# Allegro board Tiny210SDK-1310-PCB.brd
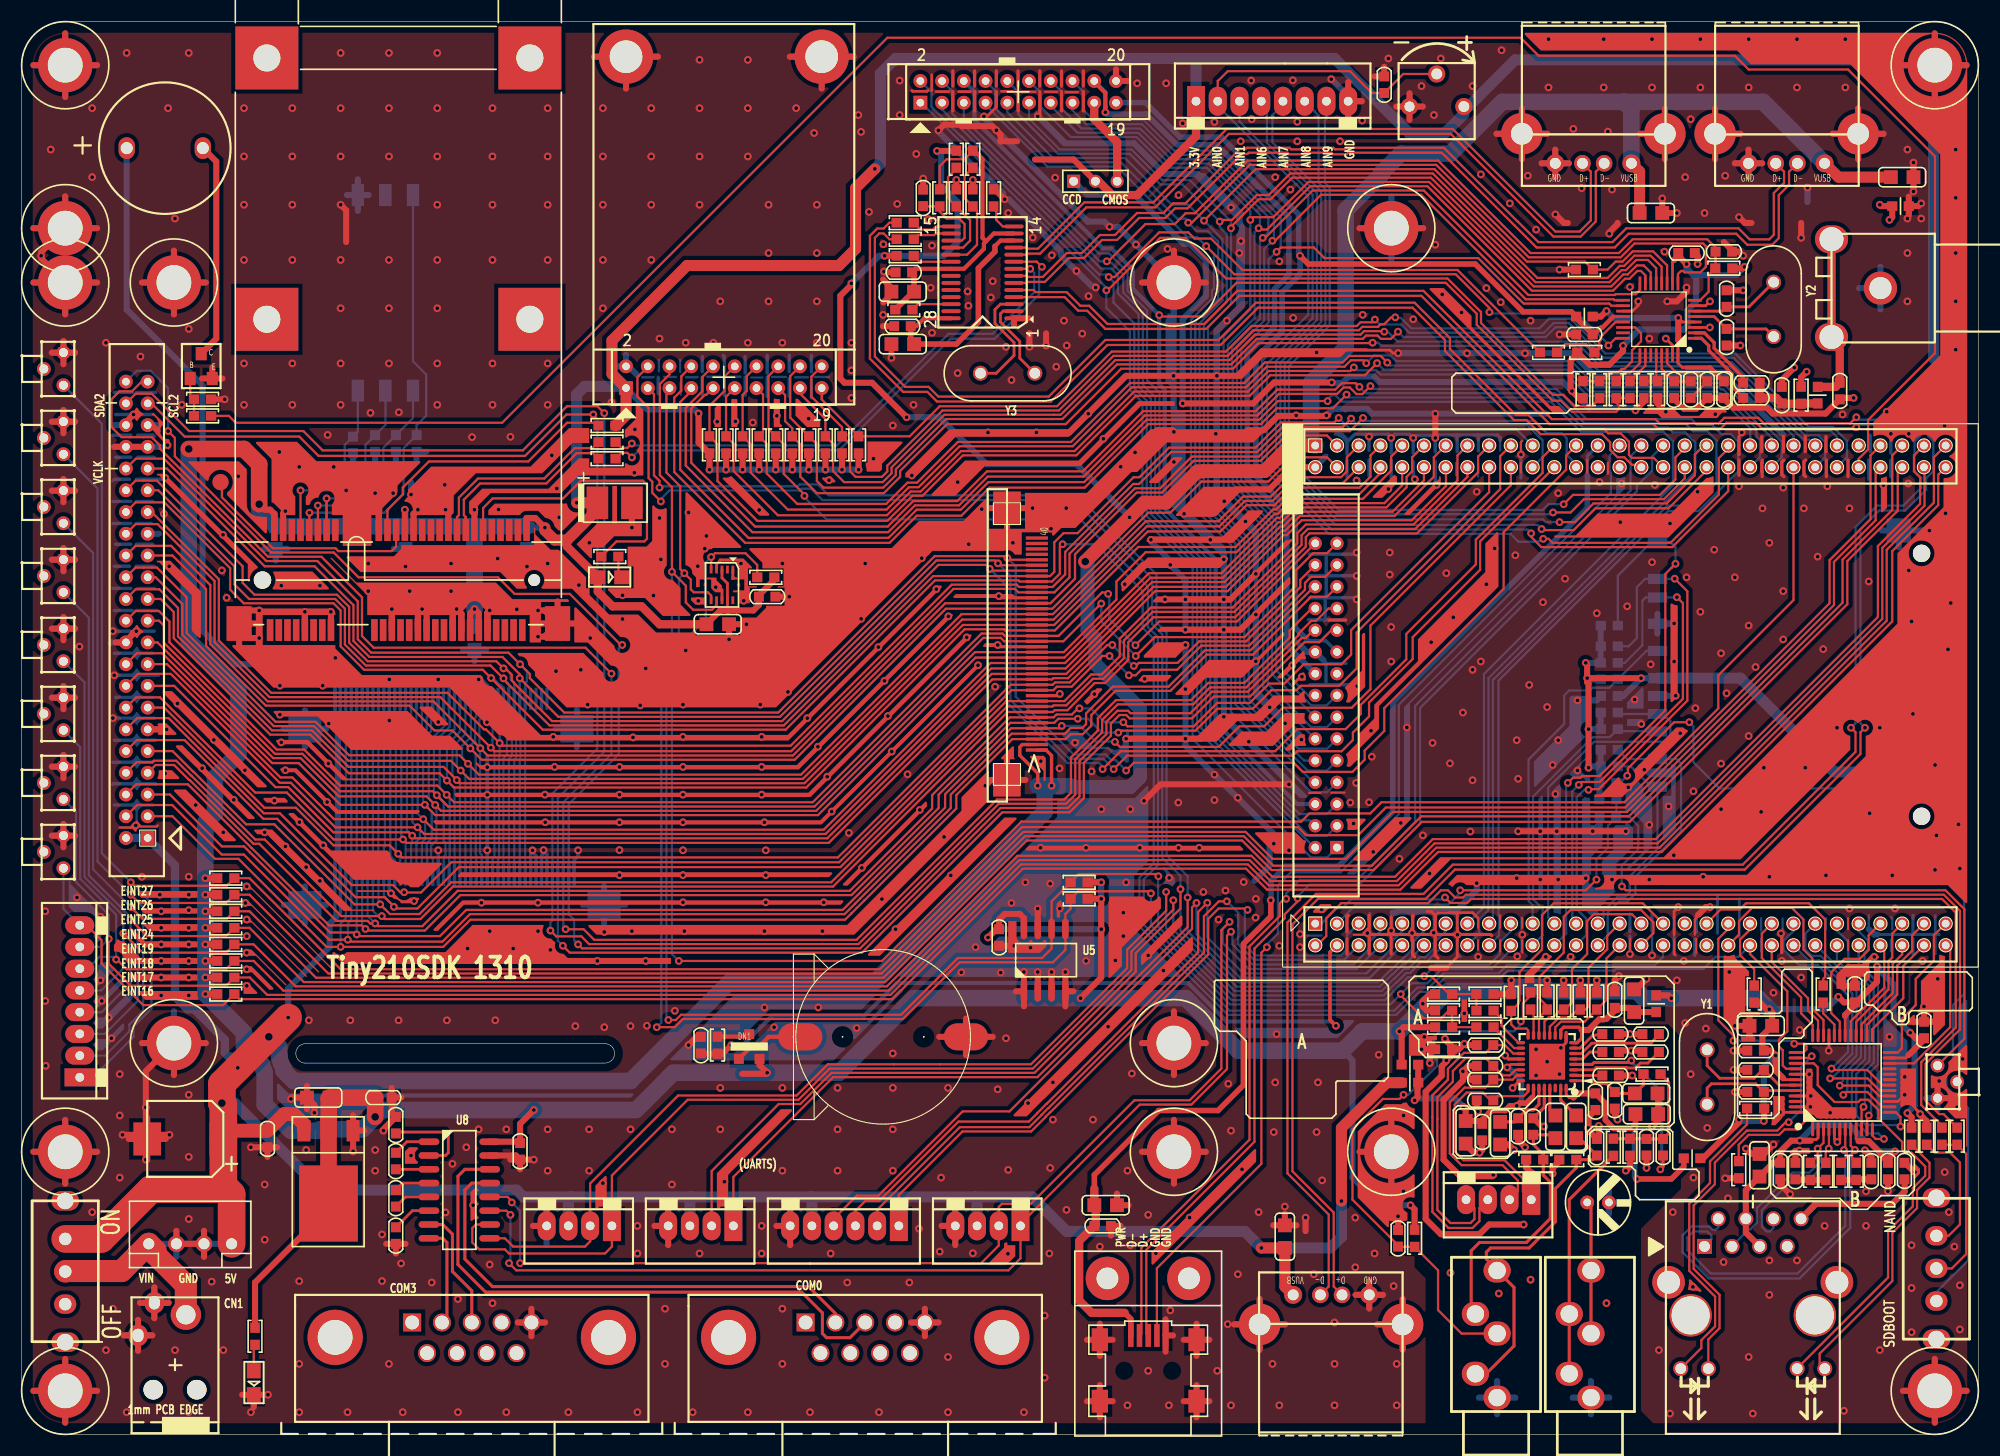
[diagram p0: board, top side]
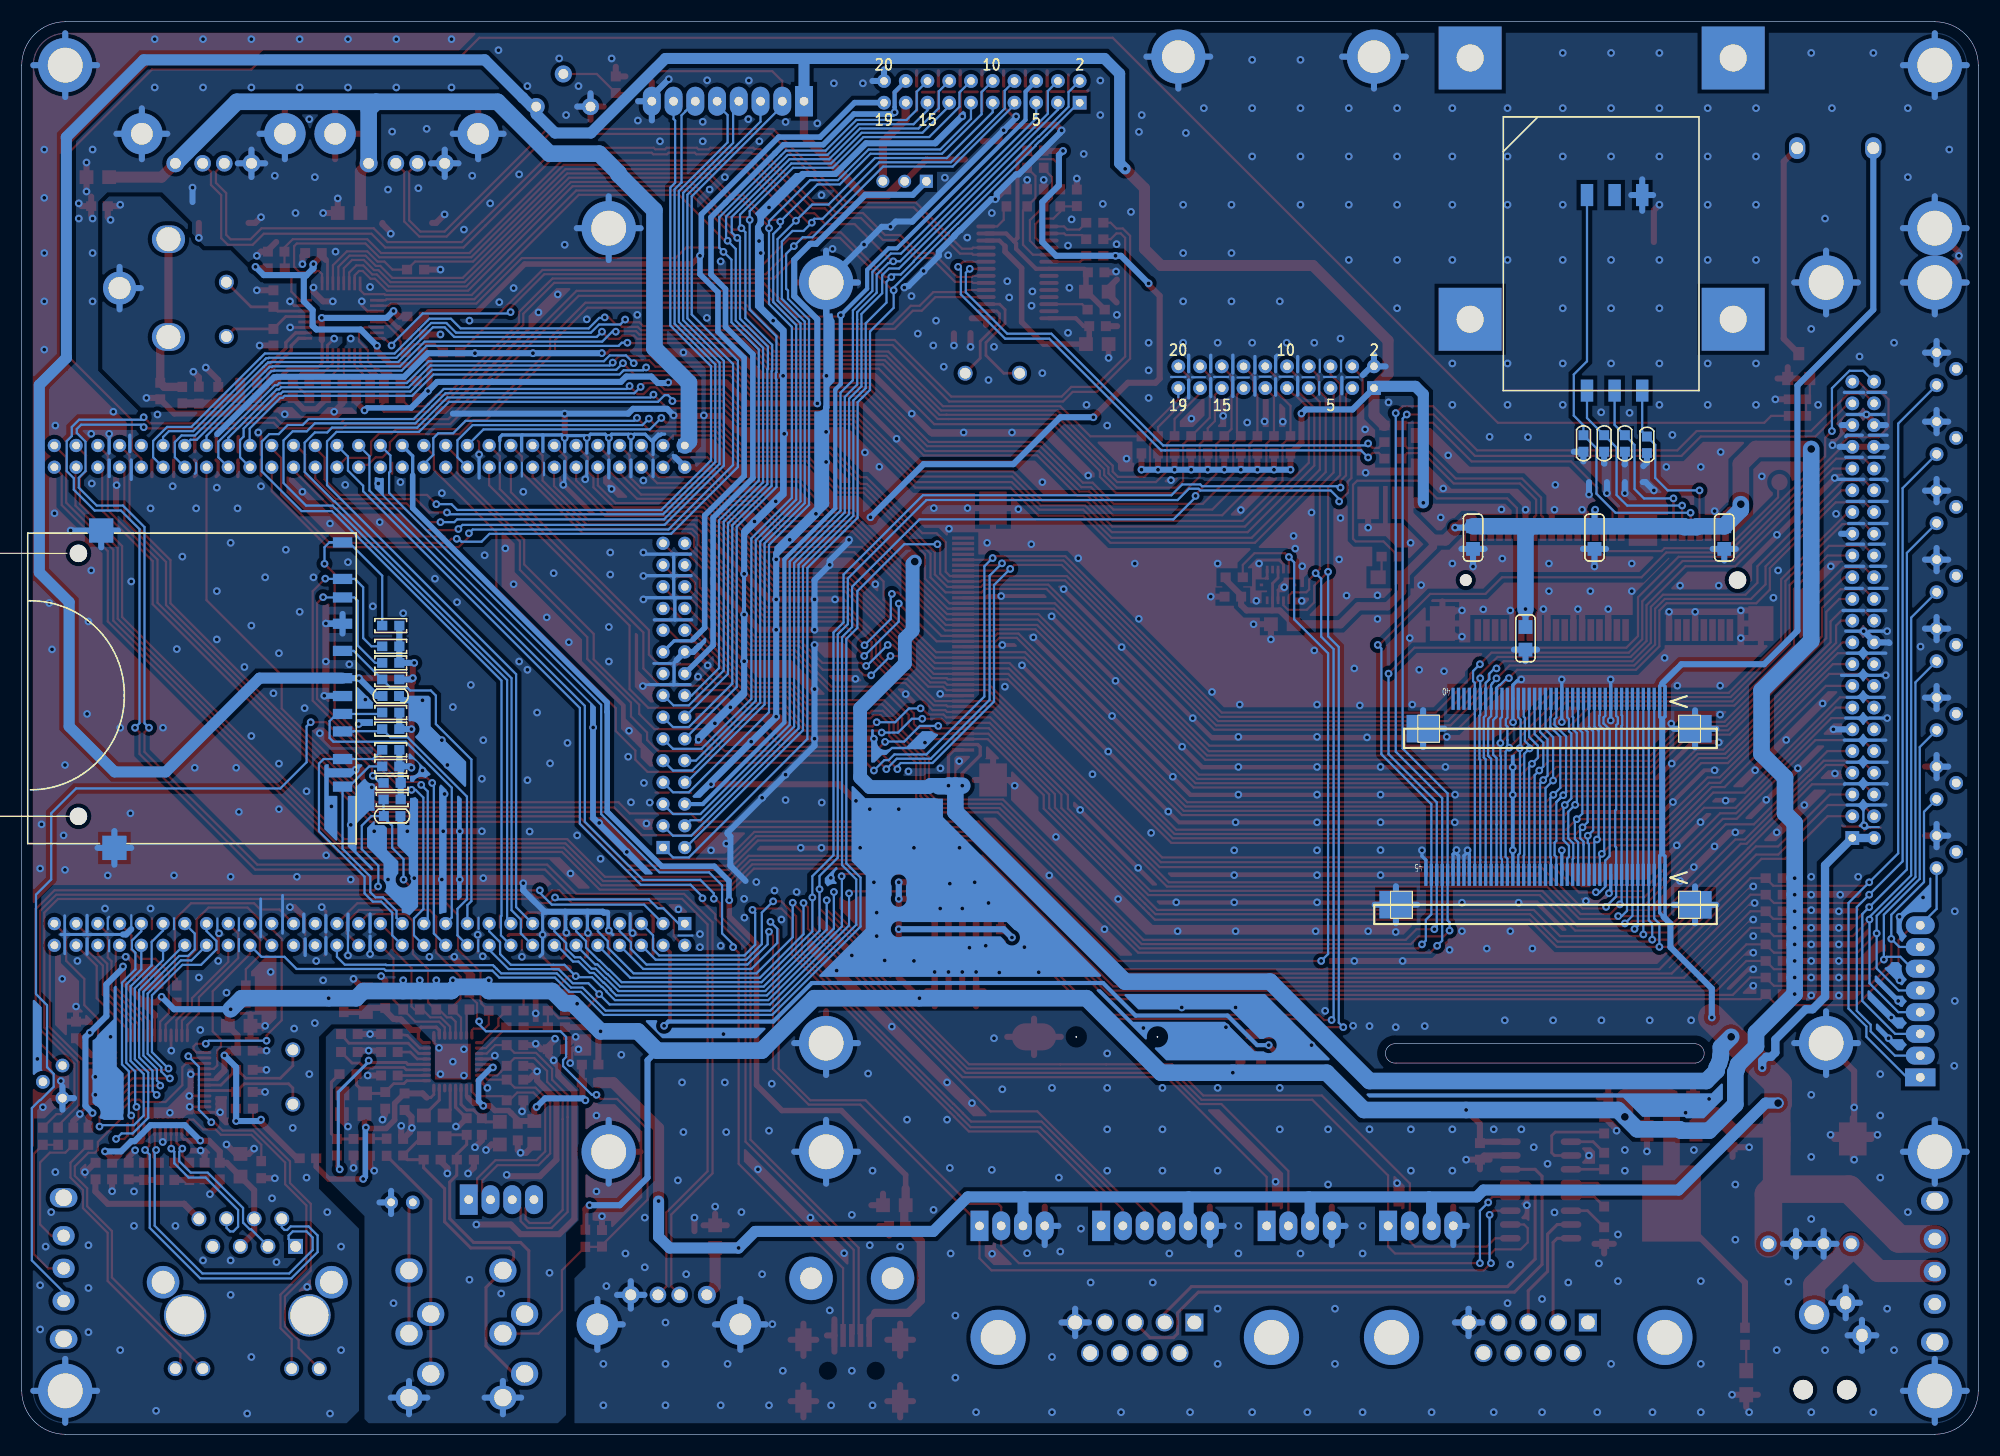
[diagram p1: board, bottom side, seen from below]

Outline 180 x 130 mm; copper layers: TOP, BOTTOM. Coordinates in mm from the lower left corner of the outline.
Outline path: 0,126 0,4 arc(1.17,1.17) 4,0 176,0 arc(178.83,1.17) 180,4 180,126 arc(178.83,128.83) 176,130 4,130 arc(1.17,128.83) 0,126 ; 26.01,35.94 53.57,35.94 arc(54.54,35.05) 53.57,34.16 26.01,34.16 arc(25.21,35.05) 26.01,35.94

## Design rules (mm)
net group 90OHM: nets USB_D+ USB_D-
net group DIFFPAIR42: nets XUHDM XUHDP
net group DIFFPAIR45: nets XUODM XUODP
net group DIFFPAIR46: nets DM9000_RX+ DM9000_RX-
net group DIFFPAIR47: nets DM9000_TX+ DM9000_TX-
net group DIFFPAIR48: nets N9616349 N9616353
net group DIFFPAIR50: nets DM2- DP2+
net group DIFFPAIR51: nets SPK_OUT_RN SPK_OUT_RP
net group DIFFPAIR52: nets SPK_OUT_LN SPK_OUT_LP
net group DIFFPAIR55: nets DM4- DP4+
net group DIFFPAIR56: nets DM3- DP3+

## Placement (name value [footprint] x y rotation side)
AVIN  -  [TVOUT]  166.5 109.98 180 top
BAT1  BATTERY  [BAT600]  71.63 36.58 90 top
BUZZER1  -  [SPEAKER]  9.91 118.37 0 top
C8  100uF/35V  [CAPSOP]  18.54 27.18 180 top
C9  104  [C0603]  22.61 27.94 270 top
C10  10uF  [C0805]  28.32 30.99 180 top
C11  104  [C0603]  32.51 30.99 0 top
C12  104  [C0603]  146.69 56.9 180 bottom
C15  10uF/16V  [C0805]  161.04 37.59 180 top
C16  104  [C0603]  175.01 36.45 90 top
C17  104  [C0603]  168.66 39.75 90 top
C18  104  [C0603]  160.27 35.31 180 top
C19  15pF  [C0603]  160.28 33.54 180 top
C20  15pF  [C0603]  160.28 31.51 180 top
C21  104  [C0603]  173.21 24.99 270 top
C22  10uF/16V  [C0805]  159.88 23.72 90 top
C23  104  [C0603]  171.69 24.99 270 top
C24  104  [C0603]  161.78 24.99 270 top
C25  104  [C0603]  170.16 23.46 90 top
C26  104  [C0603]  163.18 23.46 90 top
C27  104  [C0603]  146.81 67.94 180 bottom
C28  104  [C0603]  89.92 46.48 270 top
C29  104  [C0603]  134.37 28.57 270 top
C30  10uF  [C0805]  132.84 28.83 270 top
C31  104  [C0603]  144.78 31.37 270 top
C32  10uF  [C0805]  148.46 29.46 0 top
C33  100pF  [C0603]  139.06 27.56 90 top
C34  100pF  [C0603]  144.91 25.65 90 top
C35  104  [C0603]  126.62 17.27 90 top
C36  1uF  [C0603]  151 27.18 270 top
C37  100pF  [C0603]  135.38 30.73 180 top
C38  100pF  [C0603]  135.38 32.64 180 top
C39  104,16V  [C0603]  34.42 24.38 90 top
C40  104,16V  [C0603]  34.42 29.21 270 top
C41  220pF  [C0603]  149.48 27.18 270 top
C42  1uF  [C0603]  149.1 35.18 0 top
C43  1uF  [C0603]  145.41 35.18 0 top
C44  1uF  [C0603]  145.41 33.02 0 top
C45  1uF  [C0603]  145.41 36.83 0 top
C46  1uF  [C0603]  150.62 36.83 180 top
C47  100pF  [C0603]  135.38 33.91 180 top
C48  100pF  [C0603]  135.38 35.81 180 top
C49  104,16V  [C0603]  34.42 17.53 90 top
C50  104  [C0603]  146.56 39.24 90 top
C51  10uF/16V  [C0805]  98.68 21.08 0 top
C52  104  [C0603]  98.68 19.18 0 top
C53  104/NC  [C0603]  159.89 95.38 180 top
C54  10uF  [C0805]  148.34 38.86 90 top
C55  10uF  [C0805]  143 29.34 270 top
C56  10uF  [C0805]  141.1 29.34 270 top
C57  10uF  [C0805]  136.02 26.67 90 top
C58  104  [C0603]  137.67 29.08 270 top
C59  10uF  [C0805]  150.5 31.37 180 top
C60  104  [C0603]  146.56 31.5 270 top
C61  104,16V  [C0603]  34.42 22.48 270 top
C62  104  [C0603]  69.34 77.09 180 top
C63  104  [C0603]  159.89 96.77 180 top
C64  104  [C0603]  125.35 123.44 90 top
C65  330pF  [C0603]  161.93 94.87 90 top
C66  104  [C0603]  62.48 35.05 90 top
C67  10uF/16V  [C0805]  62.99 74.55 0 top
C68  104  [C0603]  45.85 26.8 270 top
C73  10u  [C0805]  171.96 115.7 0 top
C75  33pF  [C0603]  30.48 91.82 270 bottom
C76  33pF  [C0603]  34.42 91.95 270 bottom
C77  33pF  [C0603]  36.32 91.95 270 bottom
C78  33pF  [C0603]  32.51 91.95 270 bottom
C79  100uF  [C3528]  52.96 85.72 0 top
C96  10u  [C0805]  148.84 112.39 0 top
C97  10u  [C0805]  116.21 17.15 90 top
C104  330pF  [C0603]  167.26 96.77 270 top
C105  104  [C0603]  153.92 108.71 180 top
C106  104  [C0603]  143 101.22 0 top
C107  104  [C0603]  156.59 95.38 90 top
C108  22pF  [C0603]  156.84 103.76 90 top
C109  22pF  [C0603]  156.84 101.73 270 top
C110  1uF  [C0603]  153.54 96.9 270 top
C111  1uF  [C0603]  152.02 95.38 90 top
C112  1uF  [C0603]  155.07 95.38 90 top
C113  104  [C0603]  157.35 108.84 180 top
C142  10uF  [C0805]  23.37 83.57 270 bottom
C144  10uF  [C0805]  35.31 83.57 270 bottom
C145  10uF  [C0805]  41.66 74.3 270 bottom
C146  10uF  [C0805]  80.01 100.33 0 top
C147  104  [C0603]  80.26 101.98 0 top
C148  10uF  [C0805]  46.48 83.57 270 bottom
C153  10uF  [C0805]  80.01 105.16 0 top
C161  104  [C0603]  80.39 106.93 0 top
C162  104  [C0603]  82.93 113.03 90 top
CAMERA  CON20A  [SDWIFI-NH]  91.67 123.55 0 top
CN1  DC_JACK  [DC023B]  14.1 6.35 90 top
COM0  CONNECTOR DB9  [DB9RA_M]  77.6 10.29 90 top
COM3  CONNECTOR DB9  [DB9RA_M]  41.4 10.29 90 top
CON1  CON4  [SIP4-FA2]  92.97 19.18 180 top
CON2  CON6  [SIP6-FA2]  75.69 19.18 180 top
CON3  CON4  [SIP4-FA2]  66.55 19.18 180 top
CON4  CON4  [SIP4-FA2]  55.37 19.18 180 top
CON5  CON4  [CON4-B]  15.5 17.53 180 top
CON6  CON8  [SIP8-FA2]  113.03 122.68 0 top
CON7  CON8  [SIP8-FA2]  5.34 37.85 90 top
CON8  MF210_miniPCIe  [MINI_PCIEX1-52P-4H]  34.65 78.62 0 top
CON10  SD/MMC CARD  [SDCARD]  169.04 61.98 0 bottom
CON12  J1X4_2.0PH  [SIP4-FA]  139.96 21.59 180 top
D4  GREEN LED  [LED]  53 78.86 0 top
DN1  BAT54C  [SOT-23-D]  65.98 34.54 0 top
FB1  0R/NC  [L0603]  127.71 34.02 0 top
FB2  0R  [L0603]  153.67 25.4 180 top
FB3  0R  [L0603]  127.71 32.36 0 top
FB5  0R  [L0603]  150.37 39.62 270 top
H1  CON1  [H1]  4 4 0 top
H2  CON1  [H1]  4 126 0 top
H3  CON1  [H1]  176 126 0 top
H4  CON1  [H1]  176 4 0 top
H5  CON1  [H1]  4 26 0 top
H6  CON1  [H1]  106 26 0 top
H7  CON1  [H1]  4 106 0 top
H8  CON1  [H1]  4 111 0 top
H9  CON1  [H1]  14 36 0 top
H10  CON1  [H1]  14 106 0 top
H11  CON1  [H1]  106 36 0 top
H12  CON1  [H1]  126 26 0 top
H13  CON1  [H1]  106 106 0 top
H14  CON1  [H1]  126 111 0 top
J1  CON3  [SIP3S]  96.78 115.32 0 top
K1  SW PUSHBUTTON  [KEY-A06]  2.03 98.05 270 top
K2  SW PUSHBUTTON  [KEY-A06]  2.03 91.7 270 top
K3  SW PUSHBUTTON  [KEY-A06]  2.03 85.35 270 top
K4  SW PUSHBUTTON  [KEY-A06]  2.03 79 270 top
K5  SW PUSHBUTTON  [KEY-A06]  2.03 72.65 270 top
K6  SW PUSHBUTTON  [KEY-A06]  2.03 66.3 270 top
K7  SW PUSHBUTTON  [KEY-A06]  2.03 59.95 270 top
K8  SW PUSHBUTTON  [KEY-A06]  2.03 53.6 270 top
L6  3.3uH/0R  [L0603]  165.23 95.63 270 top
L8  0R  [L0603]  143.76 102.87 0 top
L9  0R  [L0603]  172.85 113.03 0 top
LAN1  -  [HR911105A]  159.26 21.44 180 top
LCD1  LCD-888  [CON-FPC-P05-45P]  25.65 52.45 0 bottom
LCD2  LCD-888  [CON-FPC-P05-40P]  94.36 59.82 90 top
LCD3  LCD-888  [CON-FPC-P05-40P]  25.65 68.66 0 bottom
LCD4  CON44A  [IDC44S2]  10.42 74.42 90 top
LED_3.3  RED  [LED]  21.34 5.84 270 top
MIC1  MIC  [MIC2]  144.02 21.34 0 top
MIC2  PHONEJACK STEREO SW  [EARJACK5]  144.27 16.24 270 top
MINIUSB1  USBOTG  [MINIUSB_ANT]  103.63 5.84 0 top
P1  SIMCARD  [SIM-0011]  36.2 114.05 180 bottom
PERST_N  TP  [PADC15]  18.29 87.63 0 top
Q2  3904  [SOT-23-Q]  16.51 98.31 0 top
R1  0R  [R0603]  176.66 27.43 90 top
R2  0R  [R0603]  178.05 27.43 270 top
R3  0R  [R0603]  175.26 27.43 270 top
R4  1K  [R0603]  21.46 9.02 270 top
R5  10K  [R0603]  159.38 40.51 270 top
R6  1K  [R0603]  16.64 93.73 0 top
R7  0R  [R0603]  165.74 40.51 90 top
R8  6.8K,1%  [R0603]  157.97 24.35 270 top
R9  10K  [R0603]  97.28 50.8 180 top
R10  10K  [R0603]  97.28 49.28 180 top
R11  0R  [R0603]  64.01 35.81 270 top
R12  10K  [R0603]  64.8 91.06 270 top
R13  10K  [R0603]  67.84 91.06 270 top
R14  10K  [R0603]  70.89 91.06 270 top
R15  10K  [R0603]  145.92 58.42 0 bottom
R16  10K  [R0603]  16.64 95.25 180 top
R17  10K  [R0603]  145.92 59.94 180 bottom
R18  10K  [R0603]  73.94 91.06 270 top
R19  10K  [R0603]  76.99 91.06 270 top
R20  1K  [R0603]  159.51 29.98 180 top
R21  1K  [R0603]  173.86 27.43 270 top
R23  10K  [R0603]  66.32 91.06 90 top
R24  51R  [R0603]  167.37 24.2 270 top
R25  51R  [R0603]  168.77 24.2 270 top
R26  51R  [R0603]  164.57 24.2 270 top
R27  10K  [R0603]  63.27 91.06 90 top
R28  10K  [R0603]  69.37 91.06 90 top
R29  51R  [R0603]  165.97 24.2 270 top
R30  4.7K  [R0603]  68.45 78.87 180 top
R31  4.7K  [R0603]  134.62 40.51 0 top
R32  4.7K  [R0603]  130.81 38.99 180 top
R34  10K  [R0603]  72.42 91.06 90 top
R35  10K  [R0603]  18.77 51.18 180 top
R37  10K  [R0603]  18.77 49.66 180 top
R38  10K  [R0603]  146.05 62.99 180 bottom
R39  10K  [R0603]  18.77 48.13 180 top
R40  10K  [R0603]  18.77 46.61 180 top
R41  10K  [R0603]  146.05 69.47 180 bottom
R42  10K  [R0603]  146.05 64.9 180 bottom
R43  10K  [R0603]  18.77 45.09 0 top
R46  10K  [R0603]  142.24 25.27 0 top
R47  10K  [R0603]  139.19 25.27 0 top
R49  100K  [R0603]  128.14 18.03 90 top
R51  75R  [R0603]  163.7 95.63 90 top
R57  0R  [R0603]  134.62 38.99 0 top
R58  0R  [R0603]  134.62 37.47 0 top
R59  2.2K  [R0603]  149.99 33.15 180 top
R60  10K  [R0603]  75.46 91.06 90 top
R62  47K/NC  [R0603]  147.96 26.42 90 top
R63  0R  [R0603]  130.81 35.43 0 top
R64  10K  [R0603]  18.77 43.56 0 top
R65  10K  [R0603]  18.77 42.04 0 top
R66  10K  [R0603]  18.77 40.51 0 top
R67  100R  [R0603]  146.43 26.42 90 top
R71  10K  [R0603]  146.05 66.42 180 bottom
R72  10K  [R0603]  146.05 72.52 180 bottom
R73  10K  [R0603]  146.05 70.99 180 bottom
R74  10K  [R0603]  146.05 61.47 180 bottom
R75  10K  [R0603]  53.85 92.84 0 top
R76  200R  [R0603]  54.1 80.77 0 top
R80  22R  [R0603]  53.85 89.79 0 top
R81  22R  [R0603]  53.85 91.31 0 top
R92  0R  [R0603]  138.81 39.88 270 top
R96  2.7K,1%  [R0603]  89.41 113.79 90 top
R102  100K  [R0603]  84.45 113.79 90 top
R103  10K  [R0603]  85.98 117.35 270 top
R104  20K  [R0603]  85.98 113.79 90 top
R105  10K  [R0603]  87.5 117.35 270 top
R106  NC  [R0603]  87.5 113.79 90 top
R107  10K  [R0603]  81.15 103.5 180 top
R108  0R  [R0603]  81.28 109.98 180 top
R109  0R  [R0603]  81.28 111.51 180 top
R110  NC  [R0603]  146.05 74.42 0 bottom
R114  0R  [R0603]  81.28 108.46 180 top
R126  NC  [R0603]  130.81 37.47 180 top
R127  NC  [R0603]  130.81 40.51 180 top
R128  10K  [R0603]  137.03 39.75 90 top
R129  10K  [R0603]  140.34 39.88 90 top
R131  10K  [R0603]  141.86 39.88 90 top
R132  10K  [R0603]  143.38 39.88 90 top
R133  10K  [R0603]  144.91 39.88 90 top
R137  0R  [R0603]  147.96 96.14 270 top
R138  NC  [R0603]  146.69 96.14 270 top
R139  10K  [R0603]  143.76 107.19 0 top
R140  0R  [R0603]  140.46 99.57 0 top
R141  0R  [R0603]  145.16 96.14 90 top
R142  10K  [R0603]  150.5 96.14 90 top
R143  1.2K/NC  [R0603]  143.89 99.57 0 top
R144  1.2K/NC  [R0603]  143.64 96.14 270 top
R145  0R  [R0603]  149.22 96.14 90 top
R146  10K  [R0603]  156.59 107.31 180 top
RST  SW PUSHBUTTON  [KEY-A06]  178.05 32.44 90 top
S1  SW-DIP4  [SW35]  4 15 270 top
S2  SW-DIP4  [SW35]  176.15 15.24 90 top
SDIO  CON20A  [SDWIFI-2H]  64.59 97.28 0 top
SPK1  PHONEJACK STEREO SW  [EARJACK5]  135.64 16.24 270 top
TINY210  TinyCore  [TINY6410_2]  116 43 0 top
U2  AMS1086CM-3.3  [TO-252]  30.48 27.94 180 top
U4  DM9000AEP  [LQFP48FA]  167.51 32.38 0 top
U5  AT24LC04  [SOP8]  92.2 40.77 90 top
U6  WM8960GEFL  [QFN32-19P7-TH]  140.34 34.29 180 top
U7  MMA7660FC  [DFN10-19P7X111-2TH]  64.42 78.17 180 top
U8  MAX3232  [SOP16]  37.47 26.92 0 top
U9  TVP5150  [S-PQFP-G32]  150.62 102.62 180 top
U52  FE1.1s  [TSSOP28-25P6X228]  88.39 106.93 90 top
USBH1  USB  A  [USB-A2]  148.08 116.97 0 top
USBH2  USB  A  [USB-A2]  165.86 116.97 0 top
USBH3  USB  A  [USB-A2]  116.97 12.83 180 top
W1  10K  [VR3_7X7]  129.03 123.19 0 top
Y1  25MHz  [OSC2PR-1]  155.06 35.32 270 top
Y2  14.31818MHz  [OSC2PR-1]  161.18 101.09 90 top
Y3  12MHz  [OSC2PR-1]  88.27 97.65 0 top

## Library data of the parts
AVIN = TVOUT
BAT1 = BATTERY_3
BUZZER1 = SPEAKER
C8 C10 C15 C22 C51 C67 C79 = CAP
C9 C11 C12 C16-C21 C23-C50 C52-C66 C68 C73 C75-C78 C96 C97 C104-C113 C142 C144-C148 C153 C161 C162 = CAP NP
CAMERA = CON20A
CN1 = CON3_3
COM0 COM3 = CONNECTOR DB9_2
CON1 CON3-CON5 = CON4
CON2 = CON6
CON6 CON7 = CON8
CON8 = CON50A_5
CON10 = SD_0
CON12 = J1X4_1
D4 LED_3.3 = LED
DN1 = DIODE_DUAL_CK_AJA_1
FB1-FB3 FB5 L6 L8 L9 = INDUCTOR
H1-H14 = CON1
J1 = CON3
K1-K8 RST = SW PUSHBUTTON_0
LAN1 = HR911105A
LCD1 = LCD-888_1
LCD2 LCD3 = LCD-888_2
LCD4 = CON40A_0
MIC1 = MIC
MIC2 SPK1 = PHONEJACK STEREO SW
MINIUSB1 = USB_A/B_2
P1 = SIMCARD_0
PERST_N = TP
Q2 = NPN-BEC
R1-R21 R23-R32 R34 R35 R37-R43 R46 R47 R49 R57-R60 R62-R67 R71-R76 R80 R81 R92 R96 R102-R110 R114 R126-R129 R131-R133 = R
R51 R137-R146 = RESISTOR
S1 S2 = CON5
SDIO = CON20A_4
TINY210 = TinyCore
U2 = AMS1117
U4 = DM9000AEP
U5 = AT24LC04
U6 = WM8960GEFL_0
U7 = MMA7660FC
U8 = SP3232
U9 = TVP5150
U52 = CON28C_1
USBH1-USBH3 = USBPORT_0
W1 = RESISTOR VAR_0
Y1-Y3 = CRYSTAL

## Footprints (pads in the part's own frame, mm; a bottom-side part is the same pattern mirrored in y, then rotated)
BAT600
  oval 2.489x4.064 smd: 1(0,0) 2(0,-15.24)
  round 0.127 hole 1.194: 3(0,-3.886) 4(0,-11.354)
C0603
  rect 0.914x0.914 smd: 1(0,0) 2(1.524,0)
C0805
  rect 1.27x1.27 smd: 1(0,0) 2(2.083,0)
C3528
  rect 1.981x2.997 smd: 1(0,0) 2(3.175,0)
CAPSOP
  rect 2.54x3.048 smd: 1(0,0) 2(7,0)
CON4-B
  round 1.524 hole 1.016: 1(-3.81,0) 2(-1.27,0) 3(1.27,0) 4(3.81,0)
CON-FPC-P05-40P
  rect 0.305x2.032 smd: 1(3.16,0.968) 2(3.66,0.968) 3(4.16,0.968) 4(4.66,0.968) 5(5.16,0.968) 6(5.66,0.968) 7(6.161,0.968) 8(6.661,0.968) 9(7.161,0.968) 10(7.661,0.968) 11(8.161,0.968) 12(8.661,0.968) 13(9.161,0.968) 14(9.661,0.968) 15(10.162,0.968) 16(10.662,0.968) 17(11.162,0.968) 18(11.662,0.968) 19(12.162,0.968) 20(12.662,0.968) 21(13.162,0.968) 22(13.662,0.968) 23(14.163,0.968) 24(14.663,0.968) 25(15.163,0.968) 26(15.663,0.968) 27(16.163,0.968) 28(16.663,0.968) 29(17.163,0.968) 30(17.663,0.968) 31(18.164,0.968) 32(18.664,0.968) 33(19.164,0.968) 34(19.664,0.968) 35(20.164,0.968) 36(20.664,0.968) 37(21.164,0.968) 38(21.664,0.968) 39(22.165,0.968) 40(22.665,0.968)
  rect 3.048x2.54 smd: A(0.399,3.726) B(25.42,3.713)
CON-FPC-P05-45P
  rect 0.305x2.032 smd: 1(3.16,0.968) 2(3.66,0.968) 3(4.16,0.968) 4(4.66,0.968) 5(5.16,0.968) 6(5.66,0.968) 7(6.16,0.968) 8(6.661,0.968) 9(7.161,0.968) 10(7.661,0.968) 11(8.161,0.968) 12(8.661,0.968) 13(9.161,0.968) 14(9.661,0.968) 15(10.161,0.968) 16(10.662,0.968) 17(11.162,0.968) 18(11.662,0.968) 19(12.162,0.968) 20(12.662,0.968) 21(13.162,0.968) 22(13.662,0.968) 23(14.163,0.968) 24(14.663,0.968) 25(15.163,0.968) 26(15.663,0.968) 27(16.163,0.968) 28(16.663,0.968) 29(17.163,0.968) 30(17.663,0.968) 31(18.163,0.968) 32(18.664,0.968) 33(19.164,0.968) 34(19.664,0.968) 35(20.164,0.968) 36(20.664,0.968) 37(21.164,0.968) 38(21.664,0.968) 39(22.164,0.968) 40(22.665,0.968) 41(23.165,0.968) 42(23.665,0.968) 43(24.165,0.968) 44(24.665,0.968) 45(25.165,0.968)
  rect 3.048x2.54 smd: A(0.399,3.726) B(27.92,3.714)
DB9RA_M
  rect 1.651x1.651 hole 1.27: 1(0,5.486)
  round 1.651 hole 1.27: 2(0,2.743) 3(0,0) 4(0,-2.743) 5(0,-5.486) 6(-2.819,4.115) 7(-2.819,1.372) 8(-2.819,-1.372) 9(-2.819,-4.115)
  round 5.08 hole 3.2: 10(-1.372,12.573) 11(-1.372,-12.573)
DC023B
  round 1.803 hole 1.803 unplated: (-2.25,2) (-2.25,-2)
  round 2.794 hole 1.778: 1(4.65,-1)
  oval 1.981x1.778 hole 1.219x1.016: 2(5.75,1.9) 3(2.75,3.4)
DFN10-19P7X111-2TH
  rect 0.254x0.711 smd: 1(-1,-1.412) 2(-0.5,-1.412) 3(0,-1.412) 4(0.5,-1.412) 5(1,-1.412) 6(1,1.412) 7(0.5,1.412) 8(0,1.412) 9(-0.5,1.412) 10(-1,1.412)
  rect 0.3x0.254 smd: M1(1.524,0) M2(-1.524,0)
EARJACK5
  oval 2.2x2.5 hole 1.6: 1(5.17,-1.903) 2(6.97,0.097) 3(1.17,0.097) 4(10.67,-1.903) 5(12.87,0.097)
H1
  round 5 hole 3.2: 1(0,0)
HR911105A
  round 3.9 hole 3.5 unplated: (-5.707,10.498) (5.723,10.498)
  rect 1.372x1.372 hole 0.991: 1(4.453,4.148)
  round 1.372 hole 0.991: 2(3.183,1.608) 3(1.913,4.148) 4(0.643,1.608) 5(-0.627,4.148) 6(-1.897,1.608) 7(-3.167,4.148) 8(-4.437,1.608) 9(6.633,15.398) 10(4.093,15.398) 11(-4.077,15.398) 12(-6.617,15.398)
  round 2.997 hole 2.1: M3(-7.737,7.448) M4(7.753,7.448)
IDC44S2
  rect 1.27x1.27 hole 0.7: 1(-19.547,-1.17)
  round 1.27 hole 0.7: 2(-19.547,0.83) 3(-17.547,-1.17) 4(-17.547,0.83) 5(-15.547,-1.17) 6(-15.547,0.83) 7(-13.547,-1.17) 8(-13.547,0.83) 9(-11.547,-1.17) 10(-11.547,0.83) 11(-9.547,-1.17) 12(-9.547,0.83) 13(-7.547,-1.17) 14(-7.547,0.83) 15(-5.547,-1.17) 16(-5.547,0.83) 17(-3.547,-1.17) 18(-3.547,0.83) 19(-1.547,-1.17) 20(-1.547,0.83) 21(0.453,-1.17) 22(0.453,0.83) 23(2.453,-1.17) 24(2.453,0.83) 25(4.453,-1.17) 26(4.453,0.83) 27(6.453,-1.17) 28(6.453,0.83) 29(8.453,-1.17) 30(8.453,0.83) 31(10.453,-1.17) 32(10.453,0.83) 33(12.453,-1.17) 34(12.453,0.83) 35(14.453,-1.17) 36(14.453,0.83) 37(16.453,-1.17) 38(16.453,0.83) 39(18.453,-1.17) 40(18.453,0.83) 41(20.453,-1.17) 42(20.453,0.83) 43(22.453,-1.17) 44(22.453,0.83)
KEY-A06
  round 1.27 hole 0.787: 1(1.5,1.8) 2(-1.5,1.8) 3(0,0)
L0603
  rect 0.94x0.889 smd: 1(-0.762,0) 2(0.762,0)
LED
  rect 1.4x1.27 smd: 1(-0.002,0.008) 2(2.207,0.008)
LQFP48FA
  oval 0.279x1.27 smd: 1(-2.75,-4.327) 2(-2.25,-4.327) 3(-1.75,-4.327) 4(-1.25,-4.327) 5(-0.75,-4.327) 6(-0.25,-4.327) 7(0.25,-4.327) 8(0.75,-4.327) 9(1.25,-4.327) 10(1.75,-4.327) 11(2.25,-4.327) 12(2.75,-4.327) 25(2.75,4.327) 26(2.25,4.327) 27(1.75,4.327) 28(1.25,4.327) 29(0.75,4.327) 30(0.25,4.327) 31(-0.25,4.327) 32(-0.75,4.327) 33(-1.25,4.327) 34(-1.75,4.327) 35(-2.25,4.327) 36(-2.75,4.327)
  oval 1.27x0.279 smd: 13(4.327,-2.75) 14(4.327,-2.25) 15(4.327,-1.75) 16(4.327,-1.25) 17(4.327,-0.75) 18(4.327,-0.25) 19(4.327,0.25) 20(4.327,0.75) 21(4.327,1.25) 22(4.327,1.75) 23(4.327,2.25) 24(4.327,2.75) 37(-4.327,2.75) 38(-4.327,2.25) 39(-4.327,1.75) 40(-4.327,1.25) 41(-4.327,0.75) 42(-4.327,0.25) 43(-4.327,-0.25) 44(-4.327,-0.75) 45(-4.327,-1.25) 46(-4.327,-1.75) 47(-4.327,-2.25) 48(-4.327,-2.75)
MIC2
  round 1.27 hole 0.711: 1(0,0) 2(2,0)
MINI_PCIEX1-52P-4H
  round 1.6 hole 1.6 unplated: (-12.5,0)
  rect 5.791x5.791 hole 2.489: (-12.1,48.05) (-12.1,24) (12.1,48.05) (12.1,24)
  round 1.092 hole 1.092 unplated: (12.5,0)
  rect 0.61x2.007 smd: 1(-11.8,-4.6) 2(-11.4,4.6) 3(-11,-4.6) 4(-10.6,4.6) 5(-10.2,-4.6) 6(-9.8,4.6) 7(-9.4,-4.6) 8(-9,4.6) 9(-8.6,-4.6) 10(-8.2,4.6) 11(-7.8,-4.6) 12(-7.4,4.6) 13(-7,-4.6) 14(-6.6,4.6) 15(-6.2,-4.6) 16(-5.8,4.6) 17(-2.2,-4.6) 18(-1.8,4.6) 19(-1.4,-4.6) 20(-1,4.6) 21(-0.6,-4.6) 22(-0.2,4.6) 23(0.2,-4.6) 24(0.6,4.6) 25(1,-4.6) 26(1.4,4.6) 27(1.8,-4.6) 28(2.2,4.6) 29(2.6,-4.6) 30(3,4.6) 31(3.4,-4.6) 32(3.8,4.6) 33(4.2,-4.6) 34(4.6,4.6) 35(5,-4.6) 36(5.4,4.6) 37(5.8,-4.6) 38(6.2,4.6) 39(6.6,-4.6) 40(7,4.6) 41(7.4,-4.6) 42(7.8,4.6) 43(8.2,-4.6) 44(8.6,4.6) 45(9,-4.6) 46(9.4,4.6) 47(9.8,-4.6) 48(10.2,4.6) 49(10.6,-4.6) 50(11,4.6) 51(11.4,-4.6) 52(11.8,4.6)
  rect 2.311x3.2 smd: M1(-14.65,-4) M2(14.65,-4)
MINIUSB_ANT
  round 4 hole 2 unplated: (-3.75,8.5) (3.75,8.5)
  round 0 hole 0.889 unplated: (-2.2,0) (2.2,0)
  rect 0.508x2.108 smd: 1(-1.6,3.25) 2(-0.8,3.25) 3(0,3.25) 4(0.8,3.25) 5(1.6,3.25)
  rect 1.499x2.108 smd: 6(4.45,2.85) 7(-4.45,2.85) 8(-4.45,-2.8) 9(4.45,-2.8)
OSC2PR-1
  round 1.372 hole 0.991: 1(-0.064,0) 2(4.94,0)
PADC15
  round 1.5 smd: 1(0,0)
QFN32-19P7-TH
  oval 0.813x0.305 smd: 1(-2.425,1.75) 2(-2.425,1.25) 3(-2.425,0.75) 4(-2.425,0.25) 5(-2.425,-0.25) 6(-2.425,-0.75) 7(-2.425,-1.25) 8(-2.425,-1.75) 17(2.425,-1.75) 18(2.425,-1.25) 19(2.425,-0.75) 20(2.425,-0.25) 21(2.425,0.25) 22(2.425,0.75) 23(2.425,1.25) 24(2.425,1.75)
  oval 0.305x0.813 smd: 9(-1.75,-2.425) 10(-1.25,-2.425) 11(-0.75,-2.425) 12(-0.25,-2.425) 13(0.25,-2.425) 14(0.75,-2.425) 15(1.25,-2.425) 16(1.75,-2.425) 25(1.75,2.425) 26(1.25,2.425) 27(0.75,2.425) 28(0.25,2.425) 29(-0.25,2.425) 30(-0.75,2.425) 31(-1.25,2.425) 32(-1.75,2.425)
  rect 3.302x3.302 smd: G1(0,0)
R0603
  rect 0.94x0.889 smd: 1(-0.787,0) 2(0.787,0)
S-PQFP-G32
  rect 1.27x0.254 smd: 1(-3.3,1.75) 2(-3.3,1.25) 3(-3.3,0.75) 4(-3.3,0.25) 5(-3.3,-0.25) 6(-3.3,-0.75) 7(-3.3,-1.25) 8(-3.3,-1.75) 17(3.3,-1.75) 18(3.3,-1.25) 19(3.3,-0.75) 20(3.3,-0.25) 21(3.3,0.25) 22(3.3,0.75) 23(3.3,1.25) 24(3.3,1.75)
  rect 0.254x1.27 smd: 9(-1.75,-3.3) 10(-1.25,-3.3) 11(-0.75,-3.3) 12(-0.25,-3.3) 13(0.25,-3.3) 14(0.75,-3.3) 15(1.25,-3.3) 16(1.75,-3.3) 25(1.75,3.3) 26(1.25,3.3) 27(0.75,3.3) 28(0.25,3.3) 29(-0.25,3.3) 30(-0.75,3.3) 31(-1.25,3.3) 32(-1.75,3.3)
SDCARD
  round 1.6 hole 1.6 unplated: (5.748,-19.095) (5.748,5.104)
  rect 1.778x0.94 smd: 1(-18.552,-0.168) 2(-18.552,-2.708) 3(-18.552,-5.967) 4(-18.552,-7.612) 5(-18.552,-10.119) 6(-18.552,-12.619) 7(-18.552,-15.039) 8(-18.552,-16.744) 9(-18.552,2.372) 10(-18.552,-20.104) 11(-18.552,-4.316)
  rect 2.235x2.235 smd: 12(2.438,8.009) 13(3.652,-21.199)
SDWIFI-2H
  rect 1.27x1.27 hole 0.7: 1(-9,-1)
  round 1.27 hole 0.7: 2(-9,1) 3(-7,-1) 4(-7,1) 5(-5,-1) 6(-5,1) 7(-3,-1) 8(-3,1) 9(-1,-1) 10(-1,1) 11(1,-1) 12(1,1) 13(3,-1) 14(3,1) 15(5,-1) 16(5,1) 17(7,-1) 18(7,1) 19(9,-1) 20(9,1)
  round 5 hole 3: A(9,29.5) B(-9,29.5)
SDWIFI-NH
  rect 1.27x1.27 hole 0.7: 1(-9,-1)
  round 1.27 hole 0.7: 2(-9,1) 3(-7,-1) 4(-7,1) 5(-5,-1) 6(-5,1) 7(-3,-1) 8(-3,1) 9(-1,-1) 10(-1,1) 11(1,-1) 12(1,1) 13(3,-1) 14(3,1) 15(5,-1) 16(5,1) 17(7,-1) 18(7,1) 19(9,-1) 20(9,1)
SIM-0011
  rect 1.143x2.032 smd: 1(5.28,-18) 2(2.74,-18) 3(0.2,-18) 4(5.28,0) 5(2.74,0) 6(0.2,0)
SIP3S
  rect 1.2x1.2 hole 0.8: 1(0,0)
  round 1.2 hole 0.8: 2(2,0) 3(4,0)
SIP4-FA
  rect 1.651x2.8 hole 0.8: 1(1.08,0)
  oval 1.651x2.667 hole 0.8: 2(3.08,0) 3(5.08,0) 4(7.08,0)
SIP4-FA2
  rect 1.651x2.8 hole 0.8: 1(1.08,0)
  oval 1.651x2.667 hole 0.8: 2(3.08,0) 3(5.08,0) 4(7.08,0)
SIP6-FA2
  rect 1.651x2.8 hole 0.8: 1(-5,0)
  oval 1.651x2.667 hole 0.8: 2(-3,0) 3(-1,0) 4(1,0) 5(3,0) 6(5,0)
SIP8-FA2
  rect 1.651x2.8 hole 0.8: 1(-5,0)
  oval 1.651x2.667 hole 0.8: 2(-3,0) 3(-1,0) 4(1,0) 5(3,0) 6(5,0) 7(7,0) 8(9,0)
SOP8
  oval 1.905x0.61 smd: 1(0,0) 2(0,-1.27) 3(0,-2.54) 4(0,-3.81) 5(5.74,-3.81) 6(5.74,-2.54) 7(5.74,-1.27) 8(5.74,0)
SOP16
  oval 1.905x0.61 smd: 1(0,0) 2(0,-1.27) 3(0,-2.54) 4(0,-3.81) 5(0,-5.08) 6(0,-6.35) 7(0,-7.62) 8(0,-8.89) 9(5.588,-8.89) 10(5.588,-7.62) 11(5.588,-6.35) 12(5.588,-5.08) 13(5.588,-3.81) 14(5.588,-2.54) 15(5.588,-1.27) 16(5.588,0)
SOT-23-D
  rect 0.914x0.914 smd: 1(0,0) 2(1.905,0) 3(0.953,2.286)
SOT-23-Q
  rect 1.016x1.219 smd: B(-1.016,-1.143) C(0,1.143) E(1.016,-1.143)
SPEAKER
  oval 1.5x2 hole 1.1: 1(-0.254,0) 2(6.754,0)
SW35
  oval 1.778x2.54 hole 1.524: 1(-6.477,0) 5(6.523,0)
  oval 1.778x2.032 hole 1.143: 2(-2.977,0) 3(0.023,0) 4(3.023,0)
TINY6410_2
  rect 1.219x1.219 hole 0.711: A1(3,48) B1(3,4) C1(5,11)
  round 1.219 hole 0.711: A2(3,46) A3(5,48) A4(5,46) A5(7,48) A6(7,46) A7(9,48) A8(9,46) A9(11,48) A10(11,46) A11(13,48) A12(13,46) A13(15,48) A14(15,46) A15(17,48) A16(17,46) A17(19,48) A18(19,46) A19(21,48) A20(21,46) A21(23,48) A22(23,46) A23(25,48) A24(25,46) A25(27,48) A26(27,46) A27(29,48) A28(29,46) A29(31,48) A30(31,46) A31(33,48) A32(33,46) A33(35,48) A34(35,46) A35(37,48) A36(37,46) A37(39,48) A38(39,46) A39(41,48) A40(41,46) A41(43,48) A42(43,46) A43(45,48) A44(45,46) A45(47,48) A46(47,46) A47(49,48) A48(49,46) A49(51,48) A50(51,46) A51(53,48) A52(53,46) A53(55,48) A54(55,46) A55(57,48) A56(57,46) A57(59,48) A58(59,46) A59(61,48) A60(61,46) B2(3,2) B3(5,4) B4(5,2) B5(7,4) B6(7,2) B7(9,4) B8(9,2) B9(11,4) B10(11,2) B11(13,4) B12(13,2) B13(15,4) B14(15,2) B15(17,4) B16(17,2) B17(19,4) B18(19,2) B19(21,4) B20(21,2) B21(23,4) B22(23,2) B23(25,4) B24(25,2) B25(27,4) B26(27,2) B27(29,4) B28(29,2) B29(31,4) B30(31,2) B31(33,4) B32(33,2) B33(35,4) B34(35,2) B35(37,4) B36(37,2) B37(39,4) B38(39,2) B39(41,4) B40(41,2) B41(43,4) B42(43,2) B43(45,4) B44(45,2) B45(47,4) B46(47,2) B47(49,4) B48(49,2) B49(51,4) B50(51,2) B51(53,4) B52(53,2) B53(55,4) B54(55,2) B55(57,4) B56(57,2) B57(59,4) B58(59,2) B59(61,4) B60(61,2) C2(3,11) C3(5,13) C4(3,13) C5(5,15) C6(3,15) C7(5,17) C8(3,17) C9(5,19) C10(3,19) C11(5,21) C12(3,21) C13(5,23) C14(3,23) C15(5,25) C16(3,25) C17(5,27) C18(3,27) C19(5,29) C20(3,29) C21(5,31) C22(3,31) C23(5,33) C24(3,33) C25(5,35) C26(3,35) C27(5,37) C28(3,37) C29(5,39) C30(3,39)
TO-252
  rect 1.194x1.981 smd: 1(0,0) 2(2.261,0) 3(4.521,0)
  rect 5.41x7.01 smd: 4(2.261,6.706)
TSSOP28-25P6X228
  oval 0.356x1.778 smd: 1(-4.227,-2.896) 2(-3.576,-2.896) 3(-2.926,-2.896) 4(-2.276,-2.896) 5(-1.626,-2.896) 6(-0.975,-2.896) 7(-0.325,-2.896) 8(0.325,-2.896) 9(0.975,-2.896) 10(1.626,-2.896) 11(2.276,-2.896) 12(2.926,-2.896) 13(3.576,-2.896) 14(4.227,-2.896) 15(4.227,2.896) 16(3.576,2.896) 17(2.926,2.896) 18(2.276,2.896) 19(1.626,2.896) 20(0.975,2.896) 21(0.325,2.896) 22(-0.325,2.896) 23(-0.975,2.896) 24(-1.626,2.896) 25(-2.276,2.896) 26(-2.926,2.896) 27(-3.576,2.896) 28(-4.227,2.896)
TVOUT
  oval 3.048x2.54 hole 2.21: 1(0,0) 2(0,9)
  round 3.048 hole 2.032: 3(-4.5,4.5)
USB-A2
  round 1.651 hole 1: 1(0,0) 4(-7,0)
  round 1.524 hole 1: 2(-2.504,0) 3(-4.498,0)
  round 3.81 hole 2: 5(3.084,2.718) 6(-10.074,2.718)
VR3_7X7
  round 1.575 hole 0.9: 1(-1.36,-1) 2(3.64,-1) 3(1.14,2)

## Nets
AGND: C29.2 C30.2 C31.2 C32.2 C33.2 C34.2 C37.2 C38.2 C41.2 C42.1 C43.2 C44.2 C45.2 C46.2 C47.2 C48.2 C57.1 C58.2 C59.1 C60.2 MIC1.2 MIC2.5(E) R46.1 R47.1 R62.1 R63.2 SPK1.5(E) U6.20(SPKGND2) U6.24(SPKGND1) U6.28(AGND)
AVDD_CCD_1.8V: C107.2 L8.2 U9.4(PLL_AVDD) U9.32(CH2_AVDD)
GND: BAT1.2(-) C8.2 C9.2 C10.2 C11.2 C12.2 C15.2 C16.2 C17.2 C18.2 C19.2 C20.2 C21.1 C22.2 C23.2 C24.2 C25.2 C26.2 C27.2 C28.2 C35.2 C40.1 C49.1 C50.2 C51.2 C52.2 C54.2 C62.1 C64.2 C66.2 C67.2 C68.2 C73.2 C75.2 C76.2 C77.2 C78.2 C79.2 C96.2 C97.2 C105.1 C106.1 C113.1 C142.2 C144.2 C145.2 C146.1 C147.1 C148.2 C153.1 C161.1 C162.2 CAMERA.20 CN1.2 CN1.3 COM0.5 COM3.5 CON1.4 CON2.6 CON3.4 CON4.4 CON5.2 CON5.3 CON6.8 CON8.4(GND1) CON8.9(GND2) CON8.15(GND3) CON8.18(GND4) CON8.21(GND5) CON8.26(GND6) CON8.27(GND7) CON8.29(GND8) CON8.34(GND9) CON8.35(GND10) CON8.37(GND11) CON8.40(GND12) CON8.43(GND13) CON8.M1 CON8.M2 CON10.3(GND2) CON10.6(GND1) CON10.12(PAD1) CON10.13(PAD2) H1.1 H2.1 H3.1 H4.1 H5.1 H6.1 H7.1 H8.1 H9.1 H10.1 H11.1 H12.1 H13.1 H14.1 K1.2 K2.2 K3.2 K4.2 K5.2 K6.2 K7.2 K8.2 L9.2 LCD1.11(GND1) LCD1.20(GND2) LCD1.29(GND3) LCD1.37(GND4) LCD1.38(GND5) LCD1.39(GND6) LCD1.40(GND7) LCD1.45(GND8) LCD1.A LCD1.B LCD2.11(GND1) LCD2.20(GND2) LCD2.29(GND3) LCD2.A LCD2.B LCD3.11(GND1) LCD3.20(GND2) LCD3.29(GND3) LCD3.A LCD3.B LCD4.11 LCD4.20 LCD4.29 LCD4.37 LCD4.38 LCD4.39 LCD4.40 LED_3.3.2(CATHODE) MINIUSB1.5(GND) MINIUSB1.6(#6) MINIUSB1.7(#7) MINIUSB1.8(#8) MINIUSB1.9(#9) P1.4(GND) Q2.E(EMITTER) R3.1 R8.2 R16.1 R63.1 R96.2 R104.2 R106.2 R139.1 R142.1 RST.2 SDIO.2 SDIO.A SDIO.B TINY210.A2 TINY210.C20 U2.1(GND) U4.5(AGND2) U4.6(AGND3) U4.15(GND) U4.33(GND2) U4.41(TEST) U4.45(GND1) U4.47(AGND1) U4.48(BGGND) U5.1(A0) U5.2(A1) U5.3(A2) U5.4(GND) U5.7(WP) U6.9(DGND) U6.G1(GND_PADDLE) U7.1(RESERVED1) U7.4(AVSS) U7.8(DVSS) U8.15(VSS) U9.19(DGND) U52.1(VSS) USBH1.4(GND1) USBH1.5(GND3) USBH1.6(GND2) USBH2.4(GND1) USBH2.5(GND3) USBH2.6(GND2) USBH3.4(GND1) USBH3.5(GND3) USBH3.6(GND2) W1.1(A)
GND_EARTH: C21.2 LAN1.8(CHS_GND)
VDD_3.3V: C10.1 C11.1 C15.1 C16.1 C17.1 C18.1 C27.1 C28.1 C62.2 C67.1 C68.1 C79.1 C142.1 C144.1 C145.1 C148.1 CON6.1 CON8.2(VDD_3V3A) CON8.24(VDD_3V3B) CON8.39(VDD_3V3C) CON8.41(VDD_3V3D) CON8.52(VDD_3V3E) CON10.4(VDD) D4.1(ANODE) DN1.2 FB1.1 FB2.1 FB5.1 J1.2 R4.1 R5.2 R9.1 R10.1 R12.2 R13.2 R14.2 R15.1 R17.2 R18.2 R19.2 R20.1 R21.1 R23.1 R27.1 R28.1 R30.1 R31.2 R32.2 R34.1 R35.2 R37.2 R38.2 R39.2 R40.2 R41.2 R42.2 R43.1 R49.2 R60.1 R64.1 R65.1 R66.1 R71.2 R72.2 R73.2 R74.2 R75.2 R110.1 R126.2 R127.2 R128.2 R129.2 R131.2 R132.2 R133.2 SDIO.1 U2.2(VOUT) U2.4(TAB) U4.23(VDD1) U4.30(VDD2) U4.42(VDD3) U5.8(VDD) U7.3(AVDD) U7.9(DVDD) U8.16(VDD) W1.2(B)
VDD_5V: BUZZER1.1 C8.1 C9.1 C73.1 C96.1 C97.1 CON1.3 CON2.5 CON3.3 CON4.3 CON5.1 FB3.1 LCD1.1(VDD5V_1) LCD1.2(VDD5V_2) LCD2.1(VDD5V_1) LCD2.2(VDD5V_2) LCD3.1(VDD5V_1) LCD3.2(VDD5V_2) LCD4.1 LCD4.2 R103.1 R114.2 S1.2 TINY210.A1 U2.3(VIN) USBH1.1(VBUS) USBH2.1(VBUS) USBH3.1(VBUS)
VDD_AUDIO_A3.3V: C31.1 C32.1 FB2.2 U6.32(AVDD)
VDD_AUDIO_D3.3V: C50.1 C54.1 FB5.2 U6.8(DCVDD) U6.10(DBVDD)
VDD_AUDIO_SPK: C29.1 C30.1 FB1.2 FB3.2 U6.21(SPKVDD2) U6.26(SPKVDD1)
VDD_CAM_1.8V: C106.2 CAMERA.19 L8.1 TINY210.C19 U9.20(DVDD)
VDD_CAM_2.5V: CAMERA.18 TINY210.C18
VDD_CCD_3.3V: C105.2 J1.1 R143.1 R144.2 R145.1 R146.1 U9.10(IO_DVDD)
VDD_CMOS_3.3V: CAMERA.17 J1.3
VDD_IN: CN1.1 CON5.4 S1.3
VDD_RTC_AP: C66.1 R11.2 TINY210.B4
VDD_USB_1.8V: C146.2 C147.2 U52.12(VD18_O) U52.28(VD18)
VDD_USB_3.3V: C153.2 C161.2 R102.2 R105.1 R107.2 U52.13(VD33) U52.21(VD33_O)
AUDIO_XI2SCDCLK0: R133.1 TINY210.B30 U6.11(MCLK)
AUDIO_XI2SLRCK0: R131.1 TINY210.B31 U6.13(DACLRC)
AUDIO_XI2SSCLK0: R132.1 TINY210.B29 U6.12(BCLK)
AUDIO_XI2SSDI0: R128.1 TINY210.B33 U6.16(ADCDAT)
AUDIO_XI2SSDO0_0: R129.1 TINY210.B32 U6.14(DATDAT)
CAM_A_RESET: C113.2 CAMERA.4 R146.2 TINY210.C4 U9.8(R\E\S\E\T\B\)
CAM_SCL0: CAMERA.2 R140.1 TINY210.C2
CAM_SDA0: CAMERA.1 R141.1 TINY210.C1
CAMERA_A_GPIO2: CAMERA.3 TINY210.C3
CCD_AGND: AVIN.3(GND) C65.2 C104.2 C107.1 C108.2 C109.2 C111.1 C112.1 L9.1 R51.2 U9.3(PLL_AGND) U9.7(NSUB) U9.31(CH1_AGND)
CCD_SCL: R140.2 R143.2 U9.21(SCL)
CCD_SDA: R141.2 R144.1 U9.22(SDA)
DM2-: U52.4(DM4) USBH3.2(D-)
DM3-: U52.6(DM3) USBH2.2(D-)
DM4-: U52.10(DM1) USBH1.2(D-)
DM9000_RX+: LAN1.3(RX+) R26.1 U4.3(RX+)
DM9000_RX-: LAN1.6(RX-) R29.1 U4.4(RX-)
DM9000_TX+: LAN1.1(TD+) R24.1 U4.7(TX+)
DM9000_TX-: LAN1.2(TD-) R25.1 U4.8(TX-)
DP2+: U52.5(DP4) USBH3.3(D+)
DP3+: U52.7(DP3) USBH2.3(D+)
DP4+: U52.11(DP1) USBH1.3(D+)
EARPHONE_DETECT: C35.1 R49.1 R92.1 SPK1.2(B)
LANLED: LAN1.11(LEDY-) U4.39(LED1)
LINKLED: LAN1.10(LEDG-) U4.38(LED2)
M_NRESET: C12.1 R15.2 RST.1 TINY210.B3
MICBIAS: C59.2 C60.1 R59.2 U6.1(MICBIAS)
NET_AVDD25: C22.1 C23.1 C24.1 LAN1.4(CT2) LAN1.5(CT1) U4.2(AVDD25_2) U4.9(AVDD25_1)
NWAIT: R5.1 TINY210.B41
OM1: R1.2 TINY210.B1
RSRXD0: COM0.2 U8.13(RIN1)
RSRXD3: COM3.2 U8.8(RIN2)
RSTXD0: COM0.3 U8.14(T1OUT)
RSTXD3: COM3.3 U8.7(T2OUT)
SPK_OUT_LN: C38.1 CON12.2 U6.23(SPK_LN)
SPK_OUT_LP: C37.1 CON12.1 U6.25(SPK_LP)
SPK_OUT_RN: C48.1 CON12.3 U6.19(SPK_RN)
SPK_OUT_RP: C47.1 CON12.4 U6.22(SPK_RP)
USB_D+: R80.2 U52.9(DP2)
USB_D-: R81.2 U52.8(DM2)
USIM_CLK: C76.1 CON8.12(USIM_CLK) P1.3(CLK)
USIM_DATA: C77.1 CON8.10(USIM_DATA) P1.6(DATA)
USIM_RST: C78.1 CON8.14(USIM_RESET) P1.2(RST)
USIM_VCC: C75.1 CON8.8(USIM_POWER) P1.1(VCC)
W_DISABLE_N: CON8.20(W_DISABLE_N) R75.1
WIFI0_PD_GPIO: R12.1 SDIO.11 TINY210.A41
WIFI0_RESET_GPIO: R27.2 SDIO.12 TINY210.A42
XADCAIN0: C64.1 CON6.2 TINY210.A39 W1.3(WIPER)
XADCAIN1: CON6.3 TINY210.A40
XADCAIN6_YM: CON6.4 TINY210.A38
XADCAIN7_YP: CON6.5 TINY210.A37
XADCAIN8_XM: CON6.6 TINY210.A36
XADCAIN9_XP: CON6.7 TINY210.A35
XCICLKENB: CAMERA.5 TINY210.C5
XCIHREF: CAMERA.6 R137.2 R138.2 TINY210.C6
XCIPCLK: CAMERA.8 TINY210.C8 U9.9(SCLK)
XCIVSYNC: CAMERA.7 TINY210.C7 U9.24(VSYNC/PALI)
XCIYDATA0: CAMERA.16 TINY210.C16 U9.18(YOUT0)
XCIYDATA1: CAMERA.15 TINY210.C15 U9.17(YOUT1)
XCIYDATA2: CAMERA.14 TINY210.C14 U9.16(YOUT2)
XCIYDATA3: CAMERA.13 TINY210.C13 U9.15(YOUT3)
XCIYDATA4: CAMERA.12 TINY210.C12 U9.14(YOUT4)
XCIYDATA5: CAMERA.11 TINY210.C11 U9.13(YOUT5)
XCIYDATA6: CAMERA.10 TINY210.C10 U9.12(YOUT6)
XCIYDATA7: CAMERA.9 R139.2 TINY210.C9 U9.11(YOUT7/I2CSEL)
XDACOUT: TINY210.A51
XEINT6_SD0_NWP: CON10.10(WP) R110.2 TINY210.B24
XEINT7: TINY210.B40 U4.34(INT)
XEINT8: TINY210.A30
XEINT9: R28.2 SDIO.16 TINY210.B34
XEINT10: LCD1.31(EINT10) LCD2.31(EINT10) LCD3.31(EINT10) LCD4.31 TINY210.A22
XEINT11: R30.2 TINY210.A46 U7.5(I\N\T\)
XEINT14: LCD1.43(EINT14) LCD4.43 TINY210.C24
XEINT15: LCD1.44(EINT15) LCD4.44 TINY210.C22
XEINT16/KP_COL0: CON7.1 K1.1 R35.1 TINY210.A53
XEINT17/KP_COL1: CON7.2 K2.1 R37.1 TINY210.A54
XEINT18/KP_COL2: CON7.3 K3.1 R39.1 TINY210.A55
XEINT19/KP_COL3: CON7.4 K4.1 R40.1 TINY210.A56
XEINT24/KP_ROW0: CON7.5 K5.1 R43.2 TINY210.A57
XEINT25/KP_ROW1: CON7.6 K6.1 R64.2 TINY210.A58
XEINT26/KP_ROW2: CON7.7 K7.1 R65.2 TINY210.A59
XEINT27/KP_ROW3: CON7.8 K8.1 R66.2 TINY210.A60
XI2CSCL0: R9.2 R31.1 R57.1 R127.1 SDIO.5 TINY210.B19 U5.6(SCL) U7.6(SCL)
XI2CSCL2/IEM_SPWI: LCD1.41(SCL2) LCD4.41 TINY210.C23
XI2CSDA0: R10.2 R32.1 R58.1 R126.1 SDIO.6 TINY210.B20 U5.5(SDA) U7.7(SDA)
XI2CSDA2/IEM_SCLK: LCD1.42(SDA2) LCD4.42 TINY210.C21
XM0ADDR0: TINY210.B35
XM0ADDR1: TINY210.B36
XM0ADDR2: R7.2 TINY210.B37
XM0ADDR3: TINY210.B38
XM0CSN1: TINY210.B39 U4.37(CS#)
XM0DATA0: TINY210.B45 U4.18(SD0)
XM0DATA1: TINY210.B46 U4.17(SD1)
XM0DATA2: TINY210.B47 U4.16(SD2)
XM0DATA3: TINY210.B48 U4.14(SD3)
XM0DATA4: TINY210.B49 U4.13(SD4)
XM0DATA5: TINY210.B50 U4.12(SD5)
XM0DATA6: TINY210.B51 U4.11(SD6)
XM0DATA7: TINY210.B52 U4.10(SD7)
XM0DATA8: TINY210.B53 U4.31(SD8)
XM0DATA9: TINY210.B54 U4.29(SD9)
XM0DATA10: TINY210.B55 U4.28(SD10)
XM0DATA11: TINY210.B56 U4.27(SD11)
XM0DATA12: TINY210.B57 U4.26(SD12)
XM0DATA13: TINY210.B58 U4.25(SD13)
XM0DATA14: TINY210.B59 U4.24(SD14)
XM0DATA15: TINY210.B60 U4.22(SD15)
XM0OEN: TINY210.B44 U4.35(IOR#)
XM0WEN: TINY210.B43 U4.36(IOW#)
XMMC0CDN: CON10.11(NCD) R71.1 TINY210.B23
XMMC0DATA0: CON10.7(DAT0) R73.1 TINY210.B25
XMMC0DATA1: CON10.8(DAT1) R72.1 TINY210.B26
XMMC0DATA2: CON10.9(DAT2) R74.1 TINY210.B27
XMMC0DATA3: CON10.1(CD/DAT3) R38.1 TINY210.B28
XMMC2CDN/SPI_MISO2: R14.1 SDIO.15 TINY210.A45
XMMC2CLK/SPI_CLK2: R13.1 SDIO.13 TINY210.A43
XMMC2CMD/SPI_CSN2: R23.2 SDIO.14 TINY210.A44
XMMC2DATA0/SPI_MOSI2: R18.1 SDIO.17 TINY210.A47
XMMC2DATA1: R34.2 SDIO.18 TINY210.A48
XMMC2DATA2: R19.1 SDIO.19 TINY210.A49
XMMC2DATA3: R60.2 SDIO.20 TINY210.A50
XMMCCLK0: CON10.5(CLK) R41.1 TINY210.B21
XMMCCMD0: CON10.2(CMD) R42.1 TINY210.B22
XNRSTOUT: LCD1.32(NRESET) LCD2.32(NRESET) LCD3.32(NRESET) LCD4.32 TINY210.B42 U4.40(PWRST#)
XPWMTOUT0: R6.2 TINY210.A52
XPWMTOUT1: LCD1.30(TOUT1) LCD2.30(TOUT1) LCD3.30(TOUT1) LCD4.30 TINY210.A26
XSPICKL1: SDIO.9 TINY210.B17
XSPICS1: SDIO.10 TINY210.B18
XSPIMISO1: SDIO.8 TINY210.B16
XSPIMOSI1: SDIO.7 TINY210.B15
XUCTSN1: CON2.2 TINY210.B6
XUHDM: R109.2 TINY210.A32
XUHDP: R108.2 TINY210.A34
XUODM: MINIUSB1.2(D-) TINY210.A31
XUODP: MINIUSB1.3(D+) TINY210.A33
XUODRVVBUS: TINY210.A28
XUOID: MINIUSB1.4(ID) TINY210.A29
XUOVBUS: C51.1 C52.1 MINIUSB1.1(VBUS) TINY210.A27
XURTSN1: CON2.1 TINY210.B5
XURXD0: CON1.2 TINY210.B8 U8.12(ROUT1)
XURXD1: CON2.4 TINY210.B10
XURXD2: CON3.2 SDIO.4 TINY210.B12
XURXD3: CON4.2 TINY210.B14 U8.9(ROUT2)
XUTXD0: CON1.1 TINY210.B7 U8.11(T1IN)
XUTXD1: CON2.3 TINY210.B9
XUTXD2: CON3.1 SDIO.3 TINY210.B11
XUTXD3: CON4.1 TINY210.B13 U8.10(T2IN)
XVHSYNC: LCD1.35(HSYNC) LCD2.35(HSYNC) LCD3.35(HSYNC) LCD4.35 TINY210.A24
XVVCLK: LCD1.36(VCLK) LCD2.36(VCLK) LCD3.36(VCLK) LCD4.36 TINY210.A25
XVVD0: LCD1.3(VD0) LCD2.3(VD0) LCD3.3(VD0) LCD4.3 TINY210.C25
XVVD1: LCD1.4(VD1) LCD2.4(VD1) LCD3.4(VD1) LCD4.4 TINY210.C26
XVVD2: LCD1.5(VD2) LCD2.5(VD2) LCD3.5(VD2) LCD4.5 TINY210.A20
XVVD3: LCD1.6(VD3) LCD2.6(VD3) LCD3.6(VD3) LCD4.6 TINY210.A19
XVVD4: LCD1.7(VD4) LCD2.7(VD4) LCD3.7(VD4) LCD4.7 TINY210.A18
XVVD5: LCD1.8(VD5) LCD2.8(VD5) LCD3.8(VD5) LCD4.8 TINY210.A17
XVVD6: LCD1.9(VD6) LCD2.9(VD6) LCD3.9(VD6) LCD4.9 TINY210.A16
XVVD7: LCD1.10(VD7) LCD2.10(VD7) LCD3.10(VD7) LCD4.10 TINY210.A15
XVVD8: LCD1.12(VD8) LCD2.12(VD8) LCD3.12(VD8) LCD4.12 TINY210.C27
XVVD9: LCD1.13(VD9) LCD2.13(VD9) LCD3.13(VD9) LCD4.13 TINY210.C28
XVVD10: LCD1.14(VD10) LCD2.14(VD10) LCD3.14(VD10) LCD4.14 TINY210.A14
XVVD11: LCD1.15(VD11) LCD2.15(VD11) LCD3.15(VD11) LCD4.15 TINY210.A13
XVVD12: LCD1.16(VD12) LCD2.16(VD12) LCD3.16(VD12) LCD4.16 TINY210.A12
XVVD13: LCD1.17(VD13) LCD2.17(VD13) LCD3.17(VD13) LCD4.17 TINY210.A11
XVVD14: LCD1.18(VD14) LCD2.18(VD14) LCD3.18(VD14) LCD4.18 TINY210.A10
XVVD15: LCD1.19(VD15) LCD2.19(VD15) LCD3.19(VD15) LCD4.19 TINY210.A9
XVVD16: LCD1.21(VD16) LCD2.21(VD16) LCD3.21(VD16) LCD4.21 TINY210.C29
XVVD17: LCD1.22(VD17) LCD2.22(VD17) LCD3.22(VD17) LCD4.22 TINY210.C30
XVVD18: LCD1.23(VD18) LCD2.23(VD18) LCD3.23(VD18) LCD4.23 TINY210.A8
XVVD19: LCD1.24(VD19) LCD2.24(VD19) LCD3.24(VD19) LCD4.24 TINY210.A7
XVVD20: LCD1.25(VD20) LCD2.25(VD20) LCD3.25(VD20) LCD4.25 TINY210.A6
XVVD21: LCD1.26(VD21) LCD2.26(VD21) LCD3.26(VD21) LCD4.26 TINY210.A5
XVVD22: LCD1.27(VD22) LCD2.27(VD22) LCD3.27(VD22) LCD4.27 TINY210.A4
XVVD23: LCD1.28(VD23) LCD2.28(VD23) LCD3.28(VD23) LCD4.28 TINY210.A3
XVVDEN: LCD1.33(VDEN) LCD2.33(VDEN) LCD3.33(VDEN) LCD4.33 TINY210.A21
XVVSYNC: LCD1.34(VSYNC) LCD2.34(VSYNC) LCD3.34(VSYNC) LCD4.34 TINY210.A23
N490506: R57.2 U6.17(SCLK)
N490846: R58.2 U6.18(SDIN)
N563338: C46.1 U6.6(RINPUT2)
N563659: C45.1 U6.7(RINPUT3/JD3)
N565258: C44.1 U6.2(LINPUT3/JD2)
N570115: C43.1 U6.5(RINPUT1)
N579751: C36.2 U6.4(LINPUT1)
N580413: C36.1 C41.1 R59.1 R62.2 R67.2
N605417: C34.1 C55.2 R46.2 SPK1.3(C) SPK1.4(D)
N617320: C33.1 C56.2 R47.2 SPK1.1(A)
N3676300: R1.1 R2.2 S2.3
N3676952: R2.1 TINY210.B2
N3684154: R3.2 S2.4
N3805887: LED_3.3.1(ANODE) R4.2
N3869369: R7.1 U4.32(CMD)
N3921053: C19.1 U4.43(X2) Y1.1
N3921204: C20.1 U4.44(X1) Y1.2
N3925254: R8.1 U4.1(BGRES)
N3968686: C25.1 R24.2 R25.2
N3970814: C26.1 R26.2 R29.2
N3982722: LAN1.9(LEDG+) R20.2
N3983324: LAN1.12(LEDY+) R21.2
N4027687: Q2.B(BASE) R6.1 R16.2
N4771984: C42.2 U6.3(LINPUT2)
N5234173: R92.2 U6.15(ADCLRC/GPIO1)
N5390728: C55.1 U6.31(HP_L)
N5390947: C56.1 U6.29(HP_R)
N5424123: C57.2 C58.1 U6.27(VMID)
N6095373: C39.2 U8.1(C1+)
N6095738: C39.1 U8.3(C1-)
N6103030: C40.2 U8.2(V+)
N6103395: C49.2 U8.6(V-)
N6105619: C61.1 U8.4(C2+)
N6105986: C61.2 U8.5(C2-)
N6195963: BUZZER1.2 Q2.C(COLLECTOR)
N9616349: CON8.36(USB_DM) R81.1
N9616353: CON8.38(USB_DP) R80.1
N9617073: CON8.22(PERST_N) PERST_N.1
N9617077: CON8.42(LED_WWAN_N) R76.1
N9617165: D4.2(CATHODE) R76.2
N9621622: AVIN.1(OUT) AVIN.2(~) C104.1 L6.1
N9621696: R142.2 R145.2 U9.28(PDN)
N9622060: C53.2 U9.1(AIP1A)
N9622080: C63.2 U9.2(AIP1B)
N9622122: C53.1 C63.1 C65.1 L6.2 R51.1
N9622404: C109.1 U9.5(XTAL/OSC) Y2.1
N9622412: C108.1 U9.6(XTAL2) Y2.2
N9622484: C110.2 C112.2 U9.30(REFM)
N9622488: C110.1 C111.2 U9.29(REFP)
N9622590: R137.1 U9.26(AVID)
N9622630: R138.1 U9.25(HSYNC)
N9633247: MIC2.1(A) MIC2.4(D) R67.1
N9633353: MIC1.1 MIC2.2(B) MIC2.3(C)
N9660915: U52.2(XOUT) Y3.2
N9660941: U52.3(XIN) Y3.1
N9661093: R96.1 U52.14(REXT)
N9661219: C162.1 R102.1 U52.17(XRSTJ)
N9661307: R103.2 R104.1 U52.18(VBUSM)
N9661347: R105.2 R106.1 U52.19(BUSJ)
N9661405: R107.1 U52.26(OVCJ)
N9661569: R114.1 U52.20(VDD5)
N9664735: R108.1 U52.16(DPU)
N9664751: R109.1 U52.15(DMU)
N9665832: BAT1.1(+) DN1.1
N9665883: DN1.3 R11.1
N9667328: R17.1 S2.2

Pads without a net: BAT1 3 4; COM0 1 4 6 7 8 9 10 11; COM3 1 4 6 7 8 9 10 11; CON8 1 3 5 6 7 11 13 16 17 19 23 25 28 30 31 32 33 44 45 46 47 48 49 50 51; K1 3; K2 3; K3 3; K4 3; K5 3; K6 3; K7 3; K8 3; LAN1 7 M3 M4; LCD2 37 38 39 40; LCD3 37 38 39 40; P1 5; RST 3; S1 1 4 5; S2 1 5; TINY210 C17; U4 19 20 21 46; U6 30; U7 2 10 M1 M2; U9 23 27; U52 22 23 24 25 27

## Via types
v1: diameter 0.711, hole 0.356, TOP to BOTTOM, 1292 vias
v2: diameter 1.016, hole 0.711, TOP to BOTTOM, 6 vias

## Routing (per net, layer and track width the routed paths; a pad name or vN(x,y) marks a point on that pad's centre or on a via; arc(x,y) is an arc through that point)
AGND: length 97.9
  TOP w0.305: C33.2 140.08,30.1 U6.28 ; v1(137.16,31.88) 137.82,32.54 U6.24 ; U6.20 136.78,34.54 v1(136.47,34.85)
  TOP w0.508: v1(140.05,28.32) 139.83,28.32 C33.2
  TOP w0.559: C31.2 144.15,29.21 144.15,28.32 144.11,28.28 v1(144.11,28.19) 144.11,28.11 144.27,27.94 144.27,27.81 C34.2 145.09,27.36 v1(145.09,28.38) ; R63.2 131.6,34.95 v1(131.06,34.42) 131.06,34.29 130.64,33.86 130.64,33 129.16,31.52 129.16,19.81 130.56,18.41 134.11,18.41 135,19.3 v1(138.18,19.3) ; R63.2 132.21,35.43 v1(132.72,35.94) 132.84,35.81 C48.2 ; R63.2 131.6,35.66 130.94,36.32 v1(130.94,36.4) ; R47.1 138.4,24.54 v1(138.94,24) ; v1(132.59,33.4) 132.59,32.56 130.81,30.78 130.81,25.27 132.33,23.75 135.25,23.75 v1(135.38,23.88) ; v1(132.59,33.4) 133.1,33.91 C47.2 ; v1(132.59,33.4) 133.35,32.64 C38.2 ; v1(140.84,24) 140.84,24.51 141.45,25.12 R46.1 ; C57.1 136.78,26.67 v1(137.29,26.16) ; C43.2 147.07,35.31 v1(148.08,35.31) 148.97,35.31 C42.1 ; v1(147.57,24.26) 147.96,24.64 R62.1 ; C37.2 133.86,29.83 v1(133.97,29.72) ; C29.2 134.37,26.16 v1(134.11,25.91) 133.6,25.91 132.84,26.67 C30.2 ; v1(138.3,26.42) 137.67,27.05 137.67,27.56 ; C46.2 v1(147.96,36.83) C45.2 ; v1(149.99,28.32) 150.55,28.88 C32.2 150.55,31.32 C59.1 ; C60.2 146.56,29.51 146.65,29.42 146.65,29.26 146.71,29.2 146.71,29.05 v1(146.81,28.96) ; C44.2 v1(148.17,33.02) ; C41.2 v1(149.48,24.51)
  BOTTOM w0.559: 135.74,1.84 SPK1.5 ; SPK1.5 134.05,3.37 ; SPK1.5 135.74,4.9 ; SPK1.5 137.42,3.37 ; MIC1.2 146.02,22.41 ; MIC1.2 146.02,20.27 ; MIC1.2 147.09,21.34 ; MIC2.5 146.05,3.37 ; MIC2.5 142.69,3.37 ; MIC2.5 144.37,4.9 ; MIC2.5 144.37,1.84
  vias: v1(131.44,14.86) v1(135.89,12.95) v1(138.81,14.22) v1(145.8,12.06)
AVDD_CCD_1.8V: length 19.1
  TOP w0.254: v1(152.4,102.74) 152.4,102.74 152.78,102.37 U9.4 ; 152.37,100.71 U9.32 152.37,98.58 152.78,98.17 153.16,98.17
  TOP w0.406: 153.16,98.17 155.32,98.17 C107.2
  TOP w0.559: v1(145.8,103.38) 145.29,102.87 L8.2 ; 152.37,100.71 152.4,100.74 v1(152.4,102.74)
  BOTTOM w0.559: v1(145.8,103.38) 146.43,102.74 v1(152.4,102.74)
GND: length 1885
  TOP w0.203: 153.92,45.97 153.92,47.37 154.05,47.5 ; 138.05,46.61 138.05,47.5 ; 120.47,59.05 121.69,59.05 ; 133.99,45.47 133.99,44.58 ; 137.92,89.41 137.92,88.52 ; 12.52,56.03 12.42,55.93 10.59,55.93 v1(10.49,56.03) 10.19,56.03 9.98,55.83 8.99,55.83 ; 136.02,45.47 136.02,44.45 ; 133.99,46.61 133.99,47.5 ; 136.02,46.61 136.02,47.75 ; 138.05,91.44 137.92,91.31 137.92,90.55 ; 130.05,47.75 130.3,48.01 131.34,48.01 ; 152.02,45.47 152.02,44.2 152.15,44.07 ; 138.05,45.47 138.05,44.32 ; 168.02,45.47 168.02,44.58 ; 168.02,46.48 168.02,47.5 ; 144.02,89.66 144.02,88.52 ; 154.05,45.59 154.05,44.32 ; 147.96,45.59 v1(147.96,44.2) ; 118.44,59.03 119.48,59.03 ; 152.02,47.5 152.02,46.48 ; 145.92,89.41 145.92,88.39 ; v1(123.8,46.13) 123.65,45.97 122.56,45.97
  TOP w0.254: 64.31,77.81 64.42,77.7 U7.8 ; 92.08,123.55 93.24,123.55 ; U4.45 v1(164.59,31.14) ; 132,48.01 132.06,47.95 132.06,46.61 132.08,46.59 v1(132.08,45.97) 132.08,45.41 132.06,45.39 132.06,43.92 131.06,42.93 ; 132,48.01 131.34,48.01 ; 132,48.01 133.48,48.01 133.99,47.5 ; U4.33 166.26,35.33 v1(166.24,35.31) ; v1(152.4,48.51) 152.02,48.13 152.02,47.5 ; 129.29,48.11 129.69,48.11 130.05,47.75 ; v1(126.63,99.5) 126.15,99.5 125.88,99.77 121.69,99.77 ; U4.5 166.76,27.17 v1(167.03,26.9) 167.26,27.13 U4.6 ; 88.11,123.57 89.15,123.57 ; U4.41 v1(164.45,33.14) ; 65.55,78.77 65.42,78.9 U7.1 ; 84.12,123.57 85.32,123.57 ; U7.4 63.92,80.07 64.31,80.45 ; 154.05,47.5 154.05,47.62 154.24,47.82 ; 96.04,123.52 97.16,123.52 ; U4.47 v1(164.56,30.14) 164.06,29.63 U4.48 v1(161.75,29.63) ; 94.16,123.55 95.25,123.55 ; v1(173.23,31.24) 172.62,30.63 U4.15 ; 142.07,36.22 142.07,36.03 v1(141.6,35.56) v1(140.34,34.29) ; 152.02,46.48 152.02,45.97 ; U9.19 148.2,103.37 148.72,103.89 v1(148.72,104.27) ; 83.72,123.67 83.72,125.12 ; 86.21,123.57 87.27,123.57 ; v1(88.52,121.28) 88.8,121.28 89.66,122.15 ; 66.15,76.98 v1(66.42,76.71) ; 81.89,123.67 81.97,123.6 83.29,123.6 83.36,123.67 ; 90.14,123.6 91.19,123.6
  TOP w0.279: LCD2.29 90.05,76.98 v1(89.89,77.14) ; LCD2.20 89.95,72.48 v1(89.79,72.64) ; 125.98,47.6 v1(125.98,46.35) 125.98,44.2 ; 123.93,46 135.13,46 135.23,45.9 135.25,45.9
  TOP w0.305: 166.02,89.66 166.02,88.14 ; v1(123.8,46.13) 123.8,46.43 123.97,46.6 123.97,47.4 123.95,47.41 123.95,47.75 ; v1(123.8,46.13) 123.49,46.13 ; v1(123.8,46.13) 123.97,45.96 123.97,44.6 123.95,44.59 123.95,44.2 ; v1(93.47,121.28) 93.66,121.48 93.66,123.57 ; 120.27,74.93 121.79,74.93 ; 97.66,123.57 97.66,121.79 ; 168.02,89.66 168.02,88.14 ; 121.92,45.59 121.92,44.2 ; 164.08,90.42 164.08,91.82 ; 128.02,47.75 127.97,47.7 127.97,46.6 127.91,46.54 v1(127.91,46.13) 127.91,45.46 127.97,45.4 127.97,44.12 128.14,43.94 ; 87.66,124.08 87.66,125.48 ; 161.93,44.32 161.93,46.02 v1(161.85,46.1) ; 142.07,36.22 142.09,36.23 U6.9 ; 157.99,89.66 157.99,88.27 ; 85.66,124.08 85.66,125.48 ; 157.99,91.82 157.99,90.17 ; 130.05,47.75 130.05,47.41 130.03,47.4 130.03,44.08 130.3,43.81 ; 160.12,88.14 160.12,88.59 160.09,88.62 160.09,89.38 160.12,89.41 160.12,89.66 ; 89.66,122.15 89.66,123.57 ; 162.12,88.14 161.93,88.33 161.93,89.47 162.12,89.66 ; 160.08,90.42 160.08,91.82 ; 95.66,123.57 95.66,121.79 ; 162.08,90.42 162.08,91.82 ; 89.66,124.08 89.66,125.48 ; 91.66,123.57 91.66,121.79 ; 95.66,124.08 95.66,125.48 ; 164.12,88.14 163.96,88.3 163.96,89.5 164.12,89.66 ; 165.99,90.42 165.99,91.82 ; 93.66,124.08 93.66,125.48 ; 121.92,46.23 121.92,47.62 122.05,47.75 ; 97.66,124.08 97.66,125.48 ; 91.66,124.08 91.66,125.48 ; v1(95.5,68.14) 95.34,67.98 LCD2.11 ; 87.66,123.57 87.66,121.79 ; 85.66,123.57 85.66,121.79
  TOP w0.508: C146.1 v1(80.01,99.06)
  TOP w0.559: 106.9,8.69 MINIUSB1.6 ; MINIUSB1.6 109.27,8.69 ; MINIUSB1.6 108.08,7.21 ; MINIUSB1.6 108.08,10.18 ; H10.1 14,108.93 ; H10.1 16.93,106 ; H10.1 14,103.07 ; H10.1 11.07,106 ; 16.77,16.33 CON5.2 ; CON5.2 15.57,17.53 ; CON5.2 16.77,18.72 ; C50.2 146.56,41.78 v1(146.94,42.16) ; W1.1 128.89,122.19 ; W1.1 126.46,122.19 ; W1.1 127.67,123.41 ; W1.1 127.67,120.97 ; 91.47,40.77 U5.1 ; U5.1 92.2,39.38 ; U5.1 v1(92.2,42.55) ; 1.07,26 H5.1 ; H5.1 6.93,26 ; H5.1 4,28.93 ; H5.1 4,23.07 ; v1(154.18,107.7) 154.18,108.46 C105.1 ; 141.08,115.71 USBH1.4 ; USBH1.4 142.34,116.97 ; USBH1.4 139.83,116.97 ; USBH1.4 141.08,118.23 ; 85.89,17.41 CON1.4 ; CON1.4 84.63,19.18 ; CON1.4 85.89,20.94 ; SDIO.B 58.53,126.78 ; SDIO.B 52.66,126.78 ; SDIO.B 55.59,123.85 ; 3.83,66.73 K6.2 ; K6.2 3.83,68.86 ; K6.2 4.9,67.8 ; K6.2 2.77,67.8 ; 79.25,106.27 80.01,105.51 C153.1 80.01,104.9 79.27,104.17 ; v1(158.37,108.46) 157.99,108.84 C113.1 157.35,108.97 156.59,109.73 ; USBH3.5 113.89,12.45 ; USBH3.5 116.22,10.11 ; USBH3.5 111.55,10.11 ; USBH3.5 113.89,7.77 ; v1(90.42,113.67) 89.51,114.58 R96.2 ; 108.08,1.56 MINIUSB1.9 ; MINIUSB1.9 106.9,3.04 ; MINIUSB1.9 109.27,3.04 ; MINIUSB1.9 108.08,4.53 ; 151.17,117.35 USBH1.5 ; USBH1.5 148.83,119.69 ; USBH1.5 151.17,122.02 ; 16.59,97.17 Q2.E ; Q2.E 17.53,98.21 ; Q2.E 18.47,97.17 ; MINIUSB1.5 105.23,10.58 ; MINIUSB1.5 105.23,7.61 ; MINIUSB1.5 105.92,9.09 ; 126,23.07 H12.1 ; H12.1 126,28.93 ; H12.1 123.07,26 ; K7.2 4.9,61.45 ; K7.2 3.83,62.51 ; K7.2 3.83,60.38 ; K7.2 2.77,61.45 ; 1.07,4 H1.1 ; H1.1 6.93,4 ; H1.1 4,6.93 ; H1.1 4,1.07 ; 4,123.07 H2.1 ; H2.1 1.07,126 ; H2.1 4,128.93 ; H2.1 6.93,126 ; LCD2.A 89.17,60.22 v1(88.65,59.69) ; LCD2.A 90.63,62.17 ; LCD2.A 92.34,60.22 ; K4.2 3.83,81.56 ; K4.2 3.83,79.43 ; K4.2 2.77,80.5 ; K4.2 4.9,80.5 ; K5.2 3.83,75.21 ; K5.2 4.9,74.15 ; K5.2 2.77,74.15 ; K5.2 3.83,73.08 ; 167.77,41.27 C17.2 168.66,42.16 ; v1(10.29,93.85) 9.59,93.15 LCD4.40 ; 47.71,74.62 CON8.M2 ; CON8.M2 49.3,76.65 ; CON8.M2 48.09,73.41 v1(47.5,73.41) ; CON8.M2 50.89,74.62 ; CON8.M2 48.09,75.82 v1(47.5,75.82) ; C49.1 35.31,17.53 ; C49.1 34.42,16.64 ; C49.1 33.53,17.53 ; BAT1.2 89.33,36.58 ; BAT1.2 86.87,38.25 ; BAT1.2 84.4,36.58 ; BAT1.2 86.87,34.9 ; C66.2 62.1,36.58 v1(61.34,35.81) ; U5.4 v1(96.01,42.55) ; U5.4 96.75,40.77 ; U5.4 96.01,39.38 ; 163.71,111.48 v1(163.71,110.11) ; 159.13,111.48 158.52,111.48 v1(157.99,112.01) ; 119.99,93.77 v1(120.03,93.77) 119.99,93.73 117.29,93.73 v1(117.25,93.77) 117.2,93.73 115.57,93.73 114.68,92.84 114.25,92.41 112.8,92.41 112.47,92.08 v1(109.86,92.08) 106.18,92.08 v1(106,92.25) 105.85,92.41 104.47,92.41 v1(102.43,90.36) v1(101.1,89.04) 97.3,85.24 v1(96.09,85.24) v1(92.99,85.24) LCD2.B ; v1(174.04,117.04) C73.2 v1(174.04,114.38) ; 91.57,119 90.05,119 90.05,119.63 v1(89.66,120.02) 89.28,120.4 86.5,120.4 86.37,120.52 84.85,120.52 v1(84.33,120) ; COM0.5 83.09,11.55 ; COM0.5 83.09,9.03 ; COM0.5 81.83,10.29 ; COM0.5 84.34,10.29 ; 20,75.24 20,75.24 CON8.M1 ; 20,75.24 20,73.98 20.7,73.28 v1(21.84,73.28) ; 20,75.24 20.57,75.82 v1(21.84,75.82) ; 122.71,12.83 USBH3.4 ; USBH3.4 125.23,12.83 ; USBH3.4 123.97,14.09 ; USBH3.4 123.97,11.57 ; v1(155.32,48.51) 154.94,48.51 154.24,47.82 ; CON3.4 59.47,20.94 ; CON3.4 58.21,19.18 ; CON3.4 59.47,17.41 ; v1(129.54,34.16) 129.54,35.04 129.93,35.43 ; K8.2 4.9,55.1 ; K8.2 3.83,56.16 ; K8.2 3.83,54.03 ; K8.2 2.77,55.1 ; 176,123.07 H3.1 ; H3.1 178.93,126 ; H3.1 176,128.93 ; H3.1 173.07,126 ; v1(118.11,19.94) 118.11,19.94 118.11,18.7 ; v1(24.77,30.86) 24.89,30.99 C10.2 ; 94.24,101.32 v1(94.24,100.2) ; U5.2 v1(93.47,42.55) ; R16.1 v1(18.67,95.25) ; 36.45,73.99 36.45,75.56 36.45,75.56 ; 3.83,98.48 K1.2 ; K1.2 3.83,100.61 ; K1.2 2.77,99.55 ; K1.2 4.9,99.55 ; 177.32,30.94 RST.2 176.25,32 ; LCD4.39 11.97,92.88 12.5,92.35 ; 173.61,112.15 L9.2 ; L9.2 174.51,113.03 ; L9.2 173.61,113.91 ; H8.1 1.78,108.78 v1(1.78,108.46) 1.78,108.22 H7.1 ; H8.1 6.93,111 ; H8.1 4,113.93 ; H8.1 1.07,111 ; v1(153.16,105.54) 153.16,105.16 152.27,104.27 v1(151.38,104.27) ; C8.2 11.54,29.14 ; C8.2 9.84,27.18 ; C8.2 13.25,27.18 ; C8.2 11.54,25.22 ; C68.2 45.47,25.65 43.05,25.65 ; C68.2 v1(47.12,25.27) ; C68.2 44.96,25.27 ; C68.2 45.85,24.38 ; v1(152.27,112.39) C96.2 v1(150.93,113.74) ; H9.1 16.93,36 ; H9.1 11.42,33.41 v1(11.42,30.08) 11.42,27.56 ; H9.1 14,33.07 ; H9.1 11.07,36 ; 14.23,18.72 CON5.3 15.42,17.53 ; 98,8.69 MINIUSB1.7 ; MINIUSB1.7 99.18,7.21 ; MINIUSB1.7 100.37,8.69 ; MINIUSB1.7 99.18,10.18 ; C11.2 34.04,29.59 C40.1 33.78,28.57 33.78,28.57 33.53,28.32 33.53,28.32 33.27,28.07 v1(33.27,27.94) ; C11.2 34.93,30.99 ; C11.2 34.04,31.88 ; R104.2 v1(85.98,115.44) ; 101.09,19.18 C52.2 100.2,18.29 ; C97.2 117.27,19.23 ; C97.2 115.14,19.23 ; C97.2 116.21,20.3 ; v1(103.89,82.32) v1(109.35,82.32) 111.28,82.32 113.54,84.58 113.16,84.58 v1(112.59,84.01) ; 11.42,27.56 v1(11.42,25.27) ; 11.42,27.56 11.41,27.56 v1(9.27,27.56) ; 11.42,27.56 v1(13.59,27.56) ; 46.89,9.03 COM3.5 ; COM3.5 48.15,10.29 ; COM3.5 45.63,10.29 ; COM3.5 46.89,11.55 ; v1(101.6,64.01) v1(107.06,64.01) 108.46,64.01 110.49,66.04 v1(110.59,66.04) 113.94,66.04 v1(114.81,66.9) ; 101.83,21.08 C51.2 100.76,22.15 ; 103.07,106 H13.1 ; H13.1 106,108.93 ; H13.1 108.93,106 ; C147.1 79.22,101.98 ; CON8.4 24.05,84.75 v1(24.26,84.96) ; C9.2 23.5,26.42 ; C9.2 v1(21.08,26.42) ; C9.2 22.61,25.53 ; v1(110.59,80.52) 110.08,80.01 v1(105.66,80.01) 103.17,80.01 101.47,78.31 v1(101.47,78.23) ; v1(169.57,26.14) 170.16,25.54 C25.2 ; MINIUSB1.8 100.37,3.04 ; MINIUSB1.8 98,3.04 ; MINIUSB1.8 99.18,1.56 ; MINIUSB1.8 99.18,4.53 ; USBH1.6 140.35,119.69 ; USBH1.6 135.67,119.69 ; USBH1.6 138.01,117.35 ; USBH1.6 138.01,122.02 ; v1(41.65,85.09) 41.65,85.09 CON8.40 ; 42.85,73.99 42.85,75.61 42.85,75.61 ; 73.59,123.85 SDIO.A ; SDIO.A 70.66,126.78 ; SDIO.A 76.53,126.78 ; v1(107.06,74.04) v1(110.59,74.04) 112.14,74.04 v1(113.54,75.44) ; v1(141.1,112.27) 141.88,111.48 142.24,111.48 ; 69.44,19.18 CON2.6 ; CON2.6 70.69,17.41 ; CON2.6 70.69,20.94 ; 122.03,120.92 CON6.8 ; CON6.8 122.03,124.45 ; CON6.8 123.29,122.68 ; v1(81.89,88.24) 85.85,92.2 v1(88.9,92.2) v1(93.34,92.2) 96.39,92.2 v1(98.12,93.93) 101.6,97.41 v1(105.97,97.41) v1(109.96,97.41) 112.14,97.41 114.3,99.57 v1(119.13,99.57) ; USBH2.4 158.86,118.23 ; USBH2.4 160.12,116.97 ; USBH2.4 157.61,116.97 ; USBH2.4 158.86,115.71 ; 40.45,75.51 v1(40.01,75.95) 39.65,75.59 ; 40.45,75.51 40.45,75.5 CON8.37 ; 40.45,75.51 40.45,73.99 ; CON8.29 37.25,75.53 v1(36.83,75.95) 36.45,75.56 ; v1(146.05,110.49) 146.05,110.62 146.81,111.38 146.81,111.48 ; 21.35,2.51 LED_3.3.2 ; LED_3.3.2 v1(22.65,3.64) ; LED_3.3.2 20.28,3.64 ; H7.1 6.93,106 ; H7.1 1.07,106 ; H7.1 4,103.07 ; 103.07,36 H11.1 ; H11.1 106,38.93 ; H11.1 108.93,36 ; H11.1 106,33.07 ; C20.2 v1(157.62,31.51) ; LCD4.11 12.8,64.88 ; 20,72.58 CON8.M1 ; CON8.M1 21.59,74.62 ; C26.2 163.18,25.74 v1(163.55,26.11) ; v1(116.59,59.82) 104.78,59.82 v1(103.25,58.29) ; 129.93,35.43 R63.1 130.02,35.59 v1(129.03,36.58) ; 129.93,35.43 v1(128.78,35.43) ; 103.07,26 H6.1 ; H6.1 108.93,26 ; H6.1 106,23.07 ; H6.1 106,28.93 ; 8.53,90.88 LCD4.38 LCD4.37 ; 39.65,75.59 CON8.35 ; 39.65,75.59 39.65,75.59 39.65,73.99 ; v1(79.32,107.01) 79.4,106.93 C161.1 ; CON8.43 42.85,75.61 ; 42.85,75.61 v1(43.05,75.82) ; USBH2.6 158.13,119.69 ; USBH2.6 155.79,122.02 ; USBH2.6 155.79,117.35 ; 176,1.07 H4.1 ; H4.1 176,6.93 ; H4.1 173.07,4 ; H4.1 178.93,4 ; CN1.3 10.7,10.53 ; CN1.3 10.7,7.68 ; CN1.3 9.38,9.1 ; CN1.3 12.02,9.1 ; U2.1 v1(30.48,26.04) ; U2.1 30.48,29.36 ; U2.1 31.51,27.94 ; 90.65,83.28 LCD2.B ; LCD2.B 88.95,85.24 ; v1(29.34,113.16) 29.84,112.65 29.84,109.73 ; K3.2 3.83,87.91 ; K3.2 3.83,85.78 ; K3.2 4.9,86.85 ; K3.2 2.77,86.85 ; C162.2 v1(82.93,115.57) ; C35.2 v1(126.62,20.07) ; K2.2 4.9,93.2 ; K2.2 2.77,93.2 ; K2.2 3.83,92.13 ; K2.2 3.83,94.26 ; 47.04,19.18 CON4.4 48.29,20.94 ; v1(161.16,26.67) 160.29,25.8 C22.2 159.11,25.8 v1(158.62,26.29) ; v1(28.45,75.69) 28.45,75.69 CON8.15 ; R106.2 v1(87.5,115.44) ; 166.61,119.69 USBH2.5 ; USBH2.5 168.95,117.35 ; USBH2.5 168.95,122.02 ; USBH2.5 171.29,119.69 ; 124.71,10.11 USBH3.6 ; USBH3.6 127.04,12.45 ; USBH3.6 127.04,7.77 ; v1(65.07,73.15) C67.2 v1(66.67,74.55) ; R3.1 175.26,28.81 174.65,29.42 v1(174.65,29.47) ; v1(113.54,79.19) 111.19,76.83 v1(110.59,76.83) v1(107.06,76.83) ; C62.1 v1(70.61,77.09) ; v1(26.92,29.59) 26.92,30.3 C10.2 ; v1(36.45,85.09) 36.06,84.7 36.05,84.7 36.05,84.7 CON8.26 ; CON8.9 26.05,75.69 v1(26.05,75.69) 26.05,73.99 ; C54.2 148.51,40.94 v1(149.48,41.91) ; 34.05,73.99 v1(34.05,75.95) 34.05,75.94 CON8.21 ; 100.67,125.61 CAMERA.20 101.74,124.55 ; v1(151.26,94.11) 150.5,94.87 R142.1 ; CON8.34 39.25,84.2 39.25,84.2 39.25,84.83 v1(38.99,85.09) ; 10.19,73.61 9.59,73.01 LCD4.20 8.63,72.88 ; CN1.2 12.2,13.53 ; CN1.2 12.2,10.68 ; CN1.2 13.52,12.1 ; CN1.2 10.88,12.1 ; C79.2 v1(56.13,83.44) ; R139.1 v1(141.48,107.19) ; C18.2 v1(157.48,35.31) ; C16.2 v1(175.01,39.37) ; C16.2 175.9,37.97 ; C16.2 174.12,37.97 ; v1(34.16,86.61) 32.85,85.3 32.85,84.45 32.85,84.45 CON8.18 ; 26.24,29.92 C10.2 ; C10.2 26.24,32.05 ; v1(106.93,84.71) 109.47,84.71 v1(110.63,85.86) 111.72,86.96 114.77,86.96 116.81,89 TINY210.A2 ; R8.2 v1(156.72,23.56) ; v1(130.05,93.93) v1(130.05,91.69) ; v1(147.57,55.5) v1(144.53,55.5) v1(141.22,55.5) v1(139.7,55.5) v1(137.67,55.5) ; 128.93,111 H14.1 123.07,111 ; C21.1 173.26,24.99 174.12,24.13 v1(174.18,24.13) ; 158.95,36.53 C15.2 ; C15.2 158.95,38.66 ; C15.2 v1(157.61,37.59) ; 131.06,42.93 129.67,42.93 ; 36.45,75.56 CON8.27 ; C23.2 v1(171.69,22.37) ; C106.1 v1(141.48,101.22) ; U5.7 v1(93.47,48.39) ; 92.71,101.34 v1(92.71,100.08) ; C19.2 v1(157.49,33.54) ; 125.35,125.86 C64.2 124.46,124.97 ; 91.29,102.1 U52.1 92.61,102.71 ; C24.2 161.78,23 v1(162.69,22.1) ; C28.2 v1(91.31,44.96) ; U5.3 v1(94.74,42.55)
  BOTTOM w0.203: 9.98,55.88 9.14,55.88 ; 60.2,97.31 59.11,97.31 ; 164.08,88.39 163.96,88.52 163.96,89.41 ; 172.09,46.48 172.09,47.5 171.96,47.62 ; v1(127.91,46.13) 127.91,46.61 127.91,46.62 127.91,47.38 127.91,47.39 127.91,48.03 127.97,48.09 ; 10.57,56.44 10.57,57.51 10.62,57.56 ; 72.92,97.31 74.27,97.31 ; 149.99,46.35 149.99,44.2 ; 136.02,90.55 136.02,91.44 ; 118.29,45.9 119.58,45.9 ; 162,47.47 162,46.25 v1(161.85,46.1) ; 137.97,46.51 137.97,47.55 ; 60.58,97.76 60.58,98.91 ; 67.11,97.26 68.15,97.26 ; 136.02,89.41 136.02,88.52 ; v1(129.9,46.15) 129.9,46.6 129.91,46.62 129.91,47.38 129.9,47.4 129.9,47.99 130,48.09 ; 69.01,97.31 70.31,97.31 ; v1(125.98,46.35) 125.98,47.85 126.06,47.93 ; 63.07,97.33 64.29,97.33 ; 58.62,97.82 58.62,98.88 ; 138,45.49 138,44.45 ; 160.02,46.35 160.02,47.5 ; 61.11,97.28 62.18,97.28 ; 160.02,45.59 160.02,44.45 ; 57.07,97.28 58.14,97.28 ; 131.95,89.41 131.95,88.27 ; 133.99,89.41 133.99,88.14 ; 165.99,46.48 165.99,47.5 ; 71.15,97.28 72.34,97.28 ; 60.63,96.85 60.63,95.68 ; 65.1,97.33 66.12,97.33 ; 171.96,45.47 171.96,44.45 ; 169.93,46.48 169.93,47.78
  BOTTOM w0.254: v1(122.86,68.86) 122.73,68.99 122.22,68.99 ; 120.24,70.94 121.87,70.94 ; 176.05,47.73 176.05,44.22 ; v1(125.98,46.35) 125.6,45.97 ; 158.01,49.28 158.01,45.77 ; 156.01,49.61 156.01,46.1
  BOTTOM w0.279: 132.33,43.97 132.08,44.22 v1(132.08,45.97) 132.08,47.9 131.89,48.09 ; 176.4,46 170.69,46 ; v1(125.98,46.35) 126.14,46.51 126.06,46.58 126.06,47.93 126.14,48.01 ; v1(123.8,46.13) 124.03,46.35 124.03,47.93 ; v1(129.9,46.15) 130,46.25 130,48.09 ; 127.97,48.09 127.97,46.19 v1(127.91,46.13)
  BOTTOM w0.305: v1(33.82,65.69) LCD3.11 v1(33.82,69.47) ; 120.06,90.09 119.89,89.92 ; 62.61,95.63 62.61,97.28 ; 121.15,92.04 121.14,92.05 120.85,92.05 ; 121.15,92.04 121.45,92.04 122.05,91.44 122.64,92.04 123.63,92.04 123.85,91.82 v1(123.95,91.82) ; 121.15,92.04 121.27,91.91 121.38,91.91 121.92,91.37 121.92,90.17 ; TINY210.C20 119.99,71.01 119.99,69.01 120.02,68.99 ; 68.58,95.5 68.58,97.28 ; 12.19,73.91 v1(10.54,73.91) ; 120.02,76.99 122.66,76.99 v1(122.81,76.83) ; 120.02,76.99 119.91,76.89 119.91,74.98 119.89,74.96 ; 120.02,76.99 118.47,76.99 ; 120.02,76.99 120.02,78.89 ; v1(123.95,91.82) 124.17,92.04 125.73,92.04 125.98,91.78 v1(125.98,91.69) ; v1(123.95,91.82) 123.95,90.55 ; 72.64,97.03 72.64,95.38 ; 120.02,78.89 120.02,81 ; 120.02,78.89 119.89,79.02 ; 120.02,81 118.47,81 ; 120.02,81 122.66,81 v1(122.81,81.15) ; 119.89,74.96 118.36,74.96 ; 119.89,74.96 121.79,74.96 ; v1(122.81,78.99) 122.78,79.02 119.89,79.02 ; 132.05,91.97 130.33,91.97 v1(130.05,91.69) ; 132.05,91.97 133.96,91.97 ; 132.05,91.97 132.05,90.45 ; 152.02,45.72 152.02,44.2 ; 10.54,95.89 12.32,95.89 ; 10.03,77.85 8.38,77.85 ; 10.67,77.85 12.19,77.85 ; 10.03,89.92 8.64,89.92 ; 10.54,79.88 12.19,79.88 ; LCD1.39 47.82,53.25 48.01,53.44 48.01,53.7 ; 128.02,90.3 v1(128.02,91.69) ; v1(128.02,91.69) 128.24,91.91 129.83,91.91 v1(130.05,91.69) ; v1(128.02,91.69) 127.67,92.04 126.33,92.04 v1(125.98,91.69) ; 10.54,75.82 12.45,75.82 ; 72.64,97.79 72.64,99.31 ; v1(125.98,91.69) 125.98,90.3 ; 10.54,85.85 12.06,85.85 ; v1(128.16,87.89) 128.02,88.04 128.02,89.53 ; 149.99,44.2 v1(149.99,44.07) ; 125.98,89.66 125.98,88.01 ; 10.54,87.88 13.08,87.88 v1(13.21,88.01) ; v1(42.04,69.47) 42.16,69.34 42.43,69.34 42.82,68.95 LCD3.29 42.82,65.55 v1(42.8,65.53) ; 10.54,61.85 12.06,61.85 ; 10.03,83.82 8.38,83.82 ; 48.01,53.7 48.32,53.38 LCD1.40 ; 48.01,53.7 v1(48.01,53.77) ; v1(38.32,69.47) LCD3.20 v1(38.32,65.55) ; v1(42.82,53.75) 42.82,53.62 42.82,53.61 LCD1.29 ; 133.96,91.97 134.01,91.92 134.01,90.5 ; 133.96,91.97 135.79,91.97 136.02,91.74 136.02,91.44 ; 10.54,69.85 12.57,69.85 ; 10.16,59.82 10.11,59.87 8.43,59.87 8.38,59.82 ; LCD1.45 50.82,52.85 51.18,53.21 v1(51.18,53.75) ; v1(130.05,91.69) 130.05,90.42 ; 171.96,89.66 171.96,88.14 ; 169.93,89.66 169.93,87.88 ; 10.67,59.82 10.72,59.87 12.27,59.87 12.32,59.82 ; 10.03,85.85 8.38,85.85 ; 119.89,79.02 118.41,79.02 ; 8.64,93.85 v1(10.29,93.85) 12.06,93.85 ; v1(130.18,87.38) 130.05,87.5 130.05,89.53 ; 10.16,67.82 8.64,67.82 ; 70.61,97.16 70.61,95.5 ; 123.95,89.66 123.95,88.14 ; 64.64,97.79 64.64,99.19 64.52,99.31 ; 8.38,87.76 8.51,87.88 9.91,87.88 ; 154.05,46.23 154.05,47.88 ; 173.99,45.59 173.99,44.2 ; LCD1.37 46.82,53.4 46.99,53.57 ; 8.38,61.85 10.16,61.85 ; 64.64,95.63 64.64,97.16 ; 122.22,68.99 120.02,68.99 ; 120.02,68.99 118.52,68.99 ; 10.03,73.91 v1(8.38,73.91) ; 10.54,63.88 12.32,63.88 ; LCD1.11 33.81,49.95 v1(33.98,49.79) ; LCD1.20 v1(38.32,53.75) ; 58.55,95.76 58.55,97.28 ; 149.99,47.88 149.99,46.35 ; 170.05,90.42 170.05,91.95 ; 147.96,47.88 147.96,46.23 ; 46.99,53.57 47.32,53.24 LCD1.38 ; 46.99,53.57 v1(46.99,53.75) ; 10.16,69.85 v1(8.51,69.85) ; 173.99,47.75 173.99,46.23 ; 153.92,45.59 153.92,44.07 ; 66.55,97.66 66.55,99.19 ; 10.67,89.92 12.19,89.92 ; 12.19,91.82 12.06,91.95 10.67,91.95 ; 171.96,91.69 171.96,90.3 ; v1(8.38,65.91) 10.03,65.91 ; 10.54,65.91 12.19,65.91 ; 10.54,81.92 12.06,81.92 ; 10.16,75.82 8.51,75.82 ; 8.51,63.88 10.16,63.88 ; 147.96,45.85 v1(147.96,44.2) ; v1(137.92,90.17) 137.92,88.01 ; 125.98,87.25 v1(125.73,87) ; 66.55,95.63 66.55,97.28 ; 10.54,57.91 12.06,57.91 ; 10.03,71.88 8.51,71.88 ; 62.61,97.79 62.61,99.19 ; 10.54,83.82 11.94,83.82 ; 121.92,89.66 121.92,88.14 ; 70.61,99.31 70.61,97.79 ; 10.54,67.82 12.06,67.82 ; 10.03,91.95 8.38,91.95 ; 10.67,71.88 12.06,71.88 ; 152.02,46.23 152.02,47.75 ; 9.91,79.88 8.51,79.88 ; 8.51,95.89 10.16,95.89 ; 8.51,57.91 10.16,57.91 ; 68.58,97.66 68.58,99.31 ; 10.03,81.92 8.64,81.92
  BOTTOM w0.559: CN1.2 12.2,13.53 ; CN1.2 12.2,10.68 ; CN1.2 10.88,12.1 ; CN1.2 13.52,12.1 ; 4,23.07 H5.1 ; H5.1 6.93,26 ; H5.1 1.07,26 ; H5.1 4,28.93 ; 22.3,81.48 C142.2 ; C142.2 24.43,81.48 ; C142.2 23.37,80.42 ; LCD1.A 28.01,48.72 ; LCD1.A 26.05,50.43 ; LCD1.A 24.1,48.72 ; LCD1.A 26.05,47.02 ; C27.2 144.89,67.55 v1(143.13,67.55) ; 2.77,99.55 K1.2 ; K1.2 3.83,98.48 ; K1.2 3.83,100.61 ; K1.2 4.9,99.55 ; CON5.3 14.23,18.72 ; CON5.3 15.42,17.53 ; CON5.3 13.03,17.53 ; CON5.3 14.23,16.33 ; K2.2 4.9,93.2 ; K2.2 3.83,94.26 ; K2.2 3.83,92.13 ; K2.2 2.77,93.2 ; K5.2 3.83,75.21 ; K5.2 4.9,74.15 ; K5.2 2.77,74.15 ; K5.2 3.83,73.08 ; 173.07,4 H4.1 ; H4.1 176,1.07 ; H4.1 178.93,4 ; H4.1 176,6.93 ; 169.93,46.48 170.41,46 170.69,46 ; 81.83,10.29 COM0.5 ; COM0.5 84.34,10.29 ; COM0.5 83.09,11.55 ; COM0.5 83.09,9.03 ; 139.83,116.97 USBH1.4 ; USBH1.4 141.08,118.23 ; USBH1.4 142.34,116.97 ; USBH1.4 141.08,115.71 ; K3.2 4.9,86.85 ; K3.2 3.83,87.91 ; K3.2 2.77,86.85 ; K3.2 3.83,85.78 ; 168.95,117.35 USBH2.5 ; USBH2.5 171.29,119.69 ; USBH2.5 166.61,119.69 ; USBH2.5 168.95,122.02 ; 13.34,64.87 v1(13.33,64.88) LCD4.11 ; 111.86,58.58 v1(111.89,58.58) ; 111.86,58.58 v1(109.73,60.71) 107.06,63.37 v1(107.06,64.01) v1(107.06,68.58) v1(107.06,72.64) ; 111.86,58.58 115.06,55.37 115.06,55.27 114.81,55.02 114.81,52.32 113.41,50.93 ; USBH3.5 113.89,12.45 ; USBH3.5 113.89,7.77 ; USBH3.5 116.22,10.11 ; USBH3.5 111.55,10.11 ; C144.2 v1(35.31,79.86) ; C144.2 36.37,81.48 ; C144.2 34.24,81.48 ; v1(113.54,75.44) v1(113.54,71.15) 113.54,68.12 114.76,66.9 v1(114.81,66.9) 114.81,66.85 v1(116.23,65.43) v1(117.73,63.93) ; 172.69,81.63 CON10.13 ; CON10.13 v1(175.5,83.17) ; CON10.13 171.14,83.17 ; 1.07,126 H2.1 ; H2.1 6.93,126 ; H2.1 4,123.07 ; H2.1 4,128.93 ; 11.07,106 H10.1 ; H10.1 16.93,106 ; H10.1 14,108.93 ; H10.1 14,103.07 ; 122.03,120.92 CON6.8 ; CON6.8 122.03,123.15 v1(120.47,124.71) ; CON6.8 123.29,122.68 ; 53.57,47.04 LCD1.B ; LCD1.B 53.57,50.44 ; LCD1.B 51.62,48.74 ; LCD1.B 55.53,48.74 ; H14.1 128.93,111 ; H14.1 126,108.07 ; H14.1 123.07,111 ; H14.1 126,113.93 ; 106,23.07 H6.1 ; H6.1 103.07,26 ; H6.1 108.93,26 ; H6.1 106,28.93 ; 26.05,63.23 LCD3.A ; LCD3.A 24.1,64.93 ; LCD3.A 28.01,64.93 ; LCD3.A 26.05,66.63 ; H13.1 v1(102.51,109.49) 100.87,111.12 v1(100.08,111.12) 99.59,111.61 98.07,111.61 v1(89.66,120.02) 88.52,121.16 v1(88.52,121.28) ; H13.1 103.07,106 ; H13.1 106,103.07 ; H13.1 106,108.93 ; H13.1 105.97,105.97 v1(105.97,97.41) 105.97,94.52 106,94.49 v1(106,92.25) v1(106,89.48) 106,85.64 v1(106.93,84.71) 106.93,84.58 109.19,82.32 v1(109.35,82.32) 110.59,81.08 v1(110.59,80.52) v1(110.59,76.83) v1(110.59,74.04) v1(110.59,66.04) v1(112.89,63.74) 116.59,60.05 v1(116.59,59.82) ; H3.1 176,128.93 ; H3.1 178.93,126 ; H3.1 176,123.07 ; H3.1 173.07,126 ; 123.97,11.57 USBH3.4 ; USBH3.4 122.71,12.83 ; USBH3.4 125.23,12.83 ; USBH3.4 123.97,14.09 ; 176.25,29.87 RST.2 ; RST.2 175.19,30.94 ; RST.2 176.25,32 ; v1(98.81,105.54) 98.68,105.66 98.42,105.66 v1(97.03,107.06) 95.63,108.46 95.63,108.84 94.18,110.29 94.18,110.33 93.69,110.82 93.65,110.82 90.81,113.67 v1(90.42,113.67) 90.3,113.79 90.3,114.17 88.52,115.95 88.28,115.95 84.45,119.78 84.45,119.88 v1(84.33,120) ; CON10.6 151.81,74.59 ; CON10.6 150.48,73.69 ; CON10.6 150.48,75.5 ; CON10.6 150.47,74.59 150.5,74.62 v1(152.02,74.62) ; 51.07,63.24 LCD3.B ; LCD3.B 49.12,64.94 ; LCD3.B 51.07,66.64 ; 3.83,54.03 K8.2 ; K8.2 2.77,55.1 ; K8.2 3.83,56.16 ; H8.1 6.93,111 ; H8.1 1.07,111 ; H8.1 4,113.93 ; 3.83,66.73 K6.2 ; K6.2 4.9,67.8 ; K6.2 3.83,68.86 ; K6.2 2.77,67.8 ; K4.2 4.9,80.5 ; K4.2 3.83,81.56 ; K4.2 3.83,79.43 ; K4.2 2.77,80.5 ; 164.29,113.41 v1(164.29,114.73) ; v1(133.86,50.72) 133.86,50.06 131.89,48.09 126.55,48.09 126.46,48.01 126.14,48.01 ; P1.4 30.92,115.5 ; P1.4 30.92,112.6 ; P1.4 29.91,114.05 ; P1.4 31.92,114.05 ; 32.51,87.63 v1(32.51,86.61) ; 56.62,97.49 55.82,98.28 SDIO.2 ; 40.59,72.21 C145.2 ; C145.2 42.72,72.21 ; C145.2 41.66,71.15 ; v1(126.63,99.5) 126.64,99.49 v1(132.97,99.49) v1(138.3,99.49) 142.64,99.49 144.81,97.32 156.54,97.32 156.58,97.28 156.78,97.28 162.02,92.04 ; 47.04,19.18 CON4.4 48.29,17.41 ; 127.04,7.77 USBH3.6 ; USBH3.6 124.71,10.11 ; USBH3.6 127.04,12.45 ; C75.2 30.48,89.43 30.81,89.1 ; 158.86,115.71 USBH2.4 ; USBH2.4 160.12,116.97 ; USBH2.4 158.86,118.23 ; USBH2.4 157.61,116.97 ; C148.2 v1(46.48,79.86) ; C148.2 47.55,81.48 ; C148.2 45.42,81.48 ; 37.21,90.42 C77.2 36.32,89.53 ; 58.21,19.18 CON3.4 59.47,17.41 ; 52.66,126.78 SDIO.B ; SDIO.B 58.53,126.78 ; SDIO.B 55.59,123.85 ; H11.1 108.93,36 ; H11.1 106,33.07 ; H11.1 103.07,36 ; SDIO.2 55.59,99.35 ; SDIO.2 54.53,98.28 ; 100.67,125.61 CAMERA.20 101.74,124.55 ; 169.93,53.97 CON10.12 ; CON10.12 171.48,55.52 ; CON10.12 173.02,53.97 ; CON10.12 171.48,52.42 ; 119.76,71.25 119.01,72 TINY210.C20 118.22,72 117.65,72.57 ; 1.07,4 H1.1 ; H1.1 6.93,4 ; H1.1 4,6.93 ; H1.1 4,1.07 ; 16.77,16.33 CON5.2 ; CON5.2 15.57,17.53 ; CON5.2 17.96,17.53 ; CON5.2 16.77,18.72 ; 35.81,87.63 v1(35.81,86.49) ; 135.67,119.69 USBH1.6 ; USBH1.6 138.01,117.35 ; USBH1.6 140.35,119.69 ; 45.63,10.29 COM3.5 ; COM3.5 46.89,11.55 ; COM3.5 46.89,9.03 ; COM3.5 48.15,10.29 ; C78.2 32.51,89.28 32.54,89.26 ; SDIO.A 76.53,126.78 ; SDIO.A 73.59,123.85 ; SDIO.A 70.66,126.78 ; CN1.3 12.02,9.1 ; CN1.3 9.38,9.1 ; CN1.3 10.7,7.68 ; CN1.3 10.7,10.53 ; 126,23.07 H12.1 126,28.93 ; v1(29.84,86.87) 30.61,87.63 30.86,87.63 ; 84.63,19.18 CON1.4 85.89,17.41 ; TINY210.A2 119,89.03 119.89,89.92 ; 8.18,72.82 8.23,72.88 LCD4.20 9.59,72.96 v1(10.54,73.91) ; K7.2 3.83,62.51 ; K7.2 2.77,61.45 ; K7.2 3.83,60.38 ; 158.13,119.69 USBH2.6 155.79,117.35 ; H9.1 16.93,36 ; H9.1 11.07,36 ; H9.1 14,38.93 ; H9.1 14,33.07 ; H7.1 6.93,106 ; H7.1 1.07,106 ; H7.1 4,103.07 ; v1(152.17,67.97) 151.26,67.97 151.23,67.94 CON10.3 ; v1(120.03,93.77) 120.63,94.37 123.76,94.37 124.21,93.93 v1(130.05,93.93) 140.34,93.93 ; v1(103.89,82.32) 103.89,82.17 105.66,80.39 v1(105.66,80.01) 107.06,78.61 v1(107.06,76.83) v1(107.06,74.04) ; v1(113.54,79.19) 113.54,83.06 v1(112.59,84.01) 109.96,86.64 v1(109.96,97.41) 109.96,101.57 v1(110.87,102.49) 112.01,103.63 v1(112.01,108.71) 112.01,109.66 v1(112.17,109.82) 112.14,109.84 112.14,110.11 ; LCD4.37 12.77,90.88 ; 128.89,122.19 W1.1 127.67,123.41 ; 69.44,19.18 CON2.6 70.69,17.41 ; v1(93.47,121.28) 95.94,118.81 102.32,118.81 105.15,115.99 108.17,115.99 v1(111.25,112.9) 112.01,112.14 112.01,111.42 112.14,111.29 ; 34.16,87.63 v1(34.16,86.61) ; v1(144.53,55.5) 145.16,56.13 C12.2 ; LCD4.29 12.62,82.88 ; 34.39,89.33 34.42,89.36 C76.2 ; LCD4.40 8.49,92.88 ; LCD4.39 12.58,92.88 ; LCD4.38 8.44,90.88
  vias: v1(2.16,48.13) v1(2.16,39.88) v1(2.21,33.91) v1(2.67,118.24) v1(5.08,49.4) v1(5.31,72.49) v1(6.48,122.05) v1(6.48,115.7) v1(6.48,20.45) v1(7.24,47.62) v1(7.24,41.78) v1(7.37,39.88) v1(7.75,100.46) v1(7.75,7.75) v1(8,38.35) v1(8.26,36.45) v1(8.38,11.56) v1(9.02,33.15) v1(9.02,29.34) v1(9.02,23.62) v1(9.65,127.13) v1(9.65,2.03) v1(10.92,99.19) v1(11.05,51.31) v1(12.7,49.66) v1(12.83,48.13) v1(12.83,46.61) v1(12.83,45.09) v1(12.83,43.56) v1(12.83,42.04) v1(12.83,40.39) v1(13.08,84.71) v1(13.19,60.81) v1(13.41,91.03) v1(13.46,122.05) v1(13.56,79.88) v1(14.1,111.89) v1(14.1,7.75) v1(14.32,67.26) v1(14.73,94.74) v1(15.37,127.13) v1(15.37,101.73) v1(15.37,51.31) v1(15.37,49.66) v1(15.37,48.23) v1(15.37,46.61) v1(15.37,45.09) v1(15.37,43.56) v1(15.37,42.04) v1(15.37,40.39) v1(15.37,31.24) v1(15.37,25.53) v1(15.37,19.81) v1(15.37,2.03) v1(16,57.91) v1(16.6,61.3) v1(17.48,14.05) v1(17.68,63.9) v1(18.41,79.5) v1(18.52,82.78) v1(18.54,55.4) v1(18.54,7.75) v1(18.85,76.99) v1(19.5,58.39) v1(19.91,88.16) v1(20.45,122.05) v1(20.45,117.6) v1(20.45,113.16) v1(20.45,108.08) v1(20.45,98.55) v1(20.45,94.74) v1(20.53,61.11) v1(20.57,48.9) v1(20.7,50.42) v1(20.7,47.37) v1(20.7,45.85) v1(20.7,44.32) v1(20.7,42.8) v1(20.7,41.27) v1(21.08,2.03) v1(22.35,55.4) v1(22.35,22.99) v1(22.35,17.91) v1(23.24,58.32) v1(23.7,90.4) v1(23.75,68.9) v1(23.75,66.23) v1(23.88,78.11) v1(23.88,63.68) v1(24.26,61.11) v1(24.26,54.1) v1(24.89,122.05) v1(24.89,117.6) v1(24.89,113.16) v1(24.89,108.08) v1(24.89,98.55) v1(24.89,94.74) v1(25.53,89.03) v1(25.53,14.1) v1(25.53,6.48) v1(25.53,2.03) v1(25.55,56.34) v1(26.16,52.2) v1(26.16,26.16) v1(26.42,38.1) v1(27.43,78.11) v1(27.43,50.93) v1(27.69,68.9) v1(27.74,54.2) v1(28.14,91.97) v1(28.09,58.19) v1(28.24,65.41) v1(28.2,61.73) v1(28.7,89.03) v1(28.85,71.45) v1(29.34,127.13) v1(29.34,122.05) v1(29.34,117.6) v1(29.34,108.08) v1(29.34,103.63) v1(29.34,98.55) v1(29.34,94.74) v1(29.97,2.03) v1(30.23,38.1) v1(31.88,80.14) v1(31.88,77.6) v1(32.08,94.01) v1(32.51,26.16) v1(32.51,24.26) v1(33.15,18.39) v1(33.15,14.1) v1(33.78,127.13) v1(33.78,122.05) v1(33.78,117.6) v1(33.78,108.08) v1(33.78,103.63) v1(33.78,98.55) v1(33.78,6.48) v1(34.7,94.06) v1(34.67,38.1) v1(34.9,15.72) v1(35.05,2.03) v1(35.69,77.6) v1(35.81,25.65) v1(36.09,49.07) v1(37.72,13.97) v1(38.23,127.13) v1(38.23,122.05) v1(38.23,117.6) v1(38.23,113.16) v1(38.23,108.08) v1(38.23,103.63) v1(38.23,98.55) v1(38.23,94.74) v1(38.91,87.38) v1(38.99,20.42) v1(39.12,38.1) v1(39.5,80.14) v1(39.5,77.6) v1(39.62,24.89) v1(40.13,12.45) v1(40.13,2.03) v1(40.89,26.42) v1(41.02,44.7) v1(41.43,91.77) v1(41.53,21.08) v1(42.04,28.07) v1(42.29,48.92) v1(42.82,61.39) v1(42.82,58.85) v1(43.05,46.3) v1(43.05,15.62) v1(43.31,122.05) v1(43.31,117.6) v1(43.31,113.16) v1(43.31,108.08) v1(43.31,98.55) v1(43.31,94.74) v1(43.31,12.06) v1(43.56,38.1) v1(43.79,80.59) v1(43.87,85.12) v1(44.58,28.07) v1(44.58,2.03) v1(44.96,91.8) v1(45.21,44.7) v1(45.54,75.92) v1(47.5,48.92) v1(47.5,46.3) v1(48.13,58.86) v1(48.16,56.32) v1(48.39,122.05) v1(48.39,117.6) v1(48.39,113.16) v1(48.39,108.08) v1(48.39,98.55) v1(48.39,94.74) v1(48.39,80.14) v1(48.39,28.07) v1(48.39,24.26) v1(48.64,44.58) v1(48.77,90.09) v1(48.9,64.19) v1(49.02,61.42) v1(49.15,70.23) v1(49.23,87.05) v1(49.45,84.38) v1(50.29,2.03) v1(50.93,37.57) v1(51.26,78.16) v1(51.44,70.36) v1(52.07,67.16) v1(52.22,82.04) v1(52.2,28.07) v1(52.2,24.26) v1(52.3,73.28) v1(52.96,43.56) v1(53.47,122.05) v1(53.47,117.6) v1(53.47,113.16) v1(53.47,108.08) v1(53.47,103.63) v1(53.47,23.11) v1(53.59,46.23) v1(53.59,37.47) v1(54.25,94.97) v1(54.99,61.42) v1(54.99,58.86) v1(54.99,56.32) v1(54.99,53.77) v1(54.99,51.46) v1(55.27,77.22) v1(55.27,75.03) v1(56.01,37.57) v1(56.01,28.07) v1(56.13,46.3) v1(56.24,64.14) v1(56.41,92.48) v1(56.36,88.49) v1(56.64,19.18) v1(56.64,16.64) v1(56.64,2.03) v1(56.9,67.08) v1(57.4,70.48) v1(57.4,43.56) v1(57.51,37.59) v1(57.91,122.05) v1(57.91,117.6) v1(57.91,113.16) v1(57.91,108.08) v1(58.12,77.19) v1(58.67,100.84) v1(58.67,84.33) v1(58.8,80.52) v1(59.18,11.56) v1(59.18,6.48) v1(59.82,28.07) v1(59.82,22.99) v1(60.09,38.97) v1(60.83,67.16) v1(60.83,64.19) v1(60.83,61.42) v1(60.83,58.86) v1(60.83,56.32) v1(60.83,53.75) v1(60.83,51.46) v1(60.83,48.96) v1(60.96,46.3) v1(61.09,100.46) v1(61.09,72.14) v1(61.34,84.84) v1(61.72,2.03) v1(62.2,79.89) v1(62.24,76.7) v1(62.36,126.49) v1(62.36,122.05) v1(62.36,117.6) v1(62.36,113.16) v1(62.36,16.64) v1(62.84,81.51) v1(62.99,82.68) v1(63.63,100.46) v1(63.85,77.96) v1(63.98,93.19) v1(64.26,104.27) v1(64.26,31.88) v1(64.26,28.07) v1(64.64,23.24) v1(65.66,93.22) v1(66.17,80.14) v1(66.8,126.49) v1(66.8,122.05) v1(66.8,117.6) v1(66.8,100.46) v1(66.8,2.03) v1(67.26,93.12) v1(67.84,85.06) v1(67.94,67.16) v1(68.07,64.19) v1(68.07,61.42) v1(68.07,58.86) v1(68.07,19.18) v1(68.07,16.64) v1(68.33,56.32) v1(68.33,46.3) v1(68.33,39.28) v1(68.45,53.75) v1(68.45,51.46) v1(68.45,48.96) v1(68.71,113.16) v1(68.71,108.71) v1(68.71,104.27) v1(69.22,37.47) v1(69.47,93.73) v1(69.98,100.46) v1(69.98,80.14) v1(69.98,31.88) v1(69.98,24.26) v1(69.98,11.56) v1(69.98,6.48) v1(70.49,68.32) v1(71.25,122.05) v1(72.27,65.91) v1(72.39,93.47) v1(72.52,2.03) v1(72.9,119.76) v1(73.15,113.16) v1(73.15,108.71) v1(73.15,104.27) v1(73.15,100.46) v1(73.25,63.28) v1(73.28,39.28) v1(73.66,46.3) v1(73.79,48.96) v1(74.1,60.52) v1(74.27,87.81) v1(74.42,16.64) v1(74.52,57.31) v1(75.06,31.88) v1(75.06,28.07) v1(75.06,24.26) v1(75.95,13.97) v1(76.1,55.35) v1(76.33,100.46) v1(76.33,97.92) v1(76.33,95.38) v1(76.81,37.39) v1(76.96,121.41) v1(77.22,119.86) v1(77.22,75.05) v1(77.29,52.12) v1(77.6,80.14) v1(77.95,112.5) v1(78.36,89.79) v1(78.81,72.45) v1(78.87,2.03) v1(79.14,49.26) v1(79.25,103.02) v1(79.27,109.52) v1(79.38,69.34) v1(79.69,66.1) v1(80.04,62.83) v1(80.14,92.84) v1(80.14,35.05) v1(80.14,31.88) v1(80.14,28.07) v1(80.14,24.26) v1(80.39,46.48) v1(80.54,113.23) v1(80.77,124.59) v1(80.77,121.41) v1(81.49,60.75) v1(81.66,13.97) v1(82.04,94.74) v1(82.3,117.83) v1(82.55,18.92) v1(82.62,57.46) v1(82.8,80.62) v1(83.41,111.81) v1(83.62,105.51) v1(83.74,109.4) v1(83.74,101.37) v1(84.15,77.78) v1(84.45,16.81) v1(84.58,23.62) v1(84.85,54.97) v1(85.25,75.28) v1(85.22,31.88) v1(85.22,7.11) v1(85.22,2.03) v1(85.47,51.44) v1(86.11,97.66) v1(86.11,87.63) v1(86.44,42.52) v1(86.93,73.34) v1(87.02,105.18) v1(87.1,103.86) v1(87.12,81.92) v1(87.5,16.66) v1(87.76,44.83) v1(87.98,70.77) v1(88.32,85.14) v1(89.15,104.62) v1(89.33,106.12) v1(89.55,68.8) v1(89.79,31.75) v1(90.07,42.49) v1(90.55,100.08) v1(90.55,36.45) v1(90.73,16.61) v1(90.75,112.39) v1(90.75,24.33) v1(91.06,97.03) v1(91.06,48.9) v1(91.19,82.04) v1(92.2,2.03) v1(92.33,50.8) v1(92.58,30.48) v1(92.81,44.78) v1(93.01,110.13) v1(93.73,53.98) v1(93.75,61.95) v1(94.11,10.92) v1(94.11,5.21) v1(94.54,16.64) v1(94.61,50.67) v1(94.61,24.51) v1(94.69,83.34) v1(94.77,108.51) v1(94.87,32.38) v1(94.87,28.96) v1(95.07,115.65) v1(95.17,98.25) v1(95.48,61.29) v1(95.5,48.39) v1(95.89,102.49) v1(96.14,100.2) v1(96.11,20.65) v1(96.9,63.65) v1(97.56,101.3) v1(97.92,53.98) v1(97.92,43.56) v1(98.15,104.75) v1(98.42,61.01) v1(98.55,28.96) v1(98.68,68.12) v1(99.19,17.27) v1(99.31,57.53) v1(99.52,91.62) v1(99.95,37.52) v1(100.61,43.61) v1(101.35,48.01) v1(101.35,45.85) v1(101.6,50.8) v1(101.73,24.26) v1(101.73,2.67) v1(101.98,57.53) v1(101.98,17.4) v1(102.13,33.2) v1(102.62,124.33) v1(102.87,53.98) v1(103.3,69.52) v1(103.63,44.07) v1(103.63,20.19) v1(103.63,5.84) v1(104.34,16.66) v1(105.03,42.67) v1(105.18,76.83) v1(105.28,124.33) v1(105.41,109.09) v1(105.54,2.67) v1(105.56,51.21) v1(105.66,11.4) v1(106.43,114.05) v1(106.4,58.14) v1(106.43,53.98) v1(106.81,120.65) v1(107.44,19.94) v1(108.33,53.98) v1(108.71,49.91) v1(109.73,120.78) v1(109.73,58.37) v1(109.98,5.84) v1(110.11,47.37) v1(110.74,50.04) v1(110.95,10.13) v1(111,32.26) v1(111.25,27.94) v1(111.25,2.67) v1(111.89,14.73) v1(112.14,119) v1(112.27,24.38) v1(112.42,50.83) v1(113.11,124.59) v1(113.16,121.03) v1(113.54,49.28) v1(113.51,47.55) v1(113.79,20.45) v1(115.06,6.48) v1(115.19,54.36) v1(115.19,27.81) v1(115.32,115.7) v1(115.32,32.38) v1(115.44,36.83) v1(115.7,107.94) v1(115.7,44.96) v1(115.7,2.67) v1(116.2,20.95) v1(116.59,53.75) v1(116.71,114.55) v1(116.94,124.61) v1(116.89,70.76) v1(116.97,102.74) v1(117.35,120.79) v1(117.35,119) v1(117.6,46.03) v1(117.6,44.83) v1(117.78,69.72) v1(118.87,14.73) v1(119.13,27.81) v1(119.25,32.38) v1(119.58,48.31) v1(119.63,23.37) v1(120.78,10.29) v1(120.78,6.48) v1(120.78,2.67) v1(121.28,119) v1(122.22,58.14) v1(122.53,56.21) v1(122.68,19.94) v1(122.68,15.37) v1(122.81,87.78) v1(122.76,59.94) v1(123.32,120.9) v1(123.37,103.02) v1(123.95,58.17) v1(124.13,64.74) v1(124.21,62.36) v1(124.33,53.59) v1(124.46,16.64) v1(124.84,34.92) v1(125.73,126.62) v1(125.86,81.15) v1(125.86,79.12) v1(125.98,74.3) v1(125.98,71.12) v1(126.21,13.64) v1(126.49,6.48) v1(126.49,2.67) v1(126.75,52.96) v1(126.87,56.26) v1(127.13,29.34) v1(127.13,22.35) v1(127.43,65.05) v1(128.02,102.62) v1(128.78,124.08) v1(128.91,55.12) v1(129.51,51.61) v1(129.67,72.9) v1(129.79,63.63) v1(129.92,121.41) v1(130.05,109.47) v1(130.56,126.62) v1(130.68,104.9) v1(131.06,79.25) v1(131.39,61.75) v1(131.7,75.18) v1(132.46,103.25) v1(132.59,66.42) v1(132.72,38.73) v1(133.27,55.47) v1(133.48,124.08) v1(133.48,70.36) v1(133.48,60.2) v1(133.86,86.74) v1(133.99,43.94) v1(134.24,115.95) v1(134.24,71.12) v1(134.75,105.49) v1(134.75,78.23) v1(135.51,81.53) v1(136.14,127.38) v1(136.07,104.19) v1(136.91,113.28) v1(137.41,80.9) v1(137.54,63.88) v1(137.54,51.18) v1(137.59,43.99) v1(137.67,60.33) v1(138.05,45.97) v1(138.56,115.82) v1(138.68,68.96) v1(138.81,102.49) v1(139.32,110.87) v1(139.32,35.43) v1(139.32,33.02) v1(139.7,51.05) v1(139.95,76.58) v1(140.21,43.94) v1(140.34,66.93) v1(140.46,128.4) v1(140.46,123.95) v1(140.84,61.59) v1(141.1,58.93) v1(141.35,86.61) v1(141.35,63.88) v1(141.35,51.05) v1(141.48,33.15) v1(141.99,78.74) v1(142.49,43.94) v1(142.75,120.14) v1(143.13,61.09) v1(143.51,114.68) v1(143.89,51.18) v1(144.91,75.56) v1(145.16,87.63) v1(145.54,128.4) v1(145.54,123.95) v1(145.92,119.89) v1(146.3,114.55) v1(146.3,51.05) v1(147.07,83.95) v1(147.19,87.5) v1(147.7,76.2) v1(147.8,59.54) v1(147.96,105.59) v1(148.39,67.61) v1(149,65.37) v1(149.28,61.16) v1(149.73,100.84) v1(149.73,56.08) v1(149.73,51.05) v1(149.86,70.87) v1(149.99,128.4) v1(149.99,123.95) v1(149.99,80.26) v1(150.24,87.38) v1(150.62,17.27) v1(150.62,7.75) v1(151.13,108.84) v1(151.51,57.78) v1(151.64,83.82) v1(151.64,1.91) v1(151.89,20.45) v1(152.02,71.12) v1(151.99,53.29) v1(152.27,41.78) v1(152.58,64.52) v1(152.91,43.56) v1(153.03,115.7) v1(153.03,37.85) v1(153.16,78.87) v1(153.54,121.03) v1(153.54,33.15) v1(153.75,13.56) v1(153.8,59.18) v1(153.8,23.62) v1(153.97,66.83) v1(154.18,86.74) v1(154.43,128.4) v1(154.43,123.95) v1(154.43,75.69) v1(154.69,51.31) v1(154.81,112.39) v1(154.94,37.34) v1(155.07,28.19) v1(155.7,81.41) v1(155.8,93.88) v1(156.34,71.88) v1(156.34,61.72) v1(156.34,57.53) v1(156.57,15.85) v1(156.72,115.82) v1(156.84,68.2) v1(156.97,21.72) v1(157.1,42.55) v1(157.61,78.87) v1(157.99,87.25) v1(158.24,92.2) v1(158.88,128.4) v1(158.88,123.95) v1(158.88,74.42) v1(158.88,64.26) v1(158.88,7.11) v1(159.26,1.91) v1(159.51,70.61) v1(160.02,57.28) v1(160.15,85.22) v1(160.27,61.34) v1(160.78,82.04) v1(160.78,51.31) v1(160.78,16) v1(160.78,12.83) v1(161.16,40.64) v1(161.93,43.56) v1(162.05,87.12) v1(162.05,77.6) v1(162.05,73.15) v1(163.32,128.4) v1(163.32,123.95) v1(163.32,16) v1(163.58,37.21) v1(163.7,42.04) v1(163.96,85.22) v1(164.08,61.34) v1(165.23,80.77) v1(165.74,72.26) v1(165.86,19.18) v1(165.99,51.44) v1(166.12,87.25) v1(166.37,29.59) v1(167,65.02) v1(167.51,93.85) v1(167.64,2.16) v1(167.77,128.4) v1(167.77,123.95) v1(168.15,85.22) v1(168.15,48.39) v1(169.67,22.35) v1(169.67,19.18) v1(169.93,78.49) v1(170,57.15) v1(170.43,43.94) v1(170.94,65.02) v1(170.94,7.75) v1(171.27,87.35) v1(171.58,94.11) v1(171.83,36.58) v1(171.96,92.08) v1(172.09,51.44) v1(172.34,48.39) v1(173.23,32.89) v1(173.48,118.24) v1(173.48,111.89) v1(173.48,108.71) v1(173.48,104.27) v1(173.61,92.08) v1(173.56,87.5) v1(173.61,79.5) v1(173.86,74.8) v1(173.86,17.4) v1(173.86,13.46) v1(173.86,9.4) v1(173.99,66.29) v1(174.75,113.28) v1(174.75,111.89) v1(174.88,43.56) v1(176.02,61.59) v1(176.02,51.94) v1(176.15,55.12) v1(176.28,41.91) v1(176.4,32.51) v1(176.91,92.84) v1(176.91,24.13) v1(176.99,84.76) v1(177.22,72.24) v1(177.29,20.45) v1(177.47,76.5) v1(177.8,17.27) v1(177.93,118.24) v1(177.93,113.79) v1(177.93,108.71) v1(177.93,104.27) v1(177.93,99.82) v1(178.05,30.1) v1(178.18,56.13) v1(178.31,52.07) v1(178.31,13.72) v1(178.31,9.65) v1(178.56,34.54)
